# Altium PCB STM3205P_PCB.PcbDoc
Units mm, origin at the board's own origin, x right, y up, seen from the top; angles counter-clockwise.
Board outline 100 x 75.3 mm, 4 copper layers (Top Layer, Int1 (GND), Int2 (GND), Bottom Layer), stack 1.562 mm thick; 101 components, 84 nets, 329 pads, 73 vias.
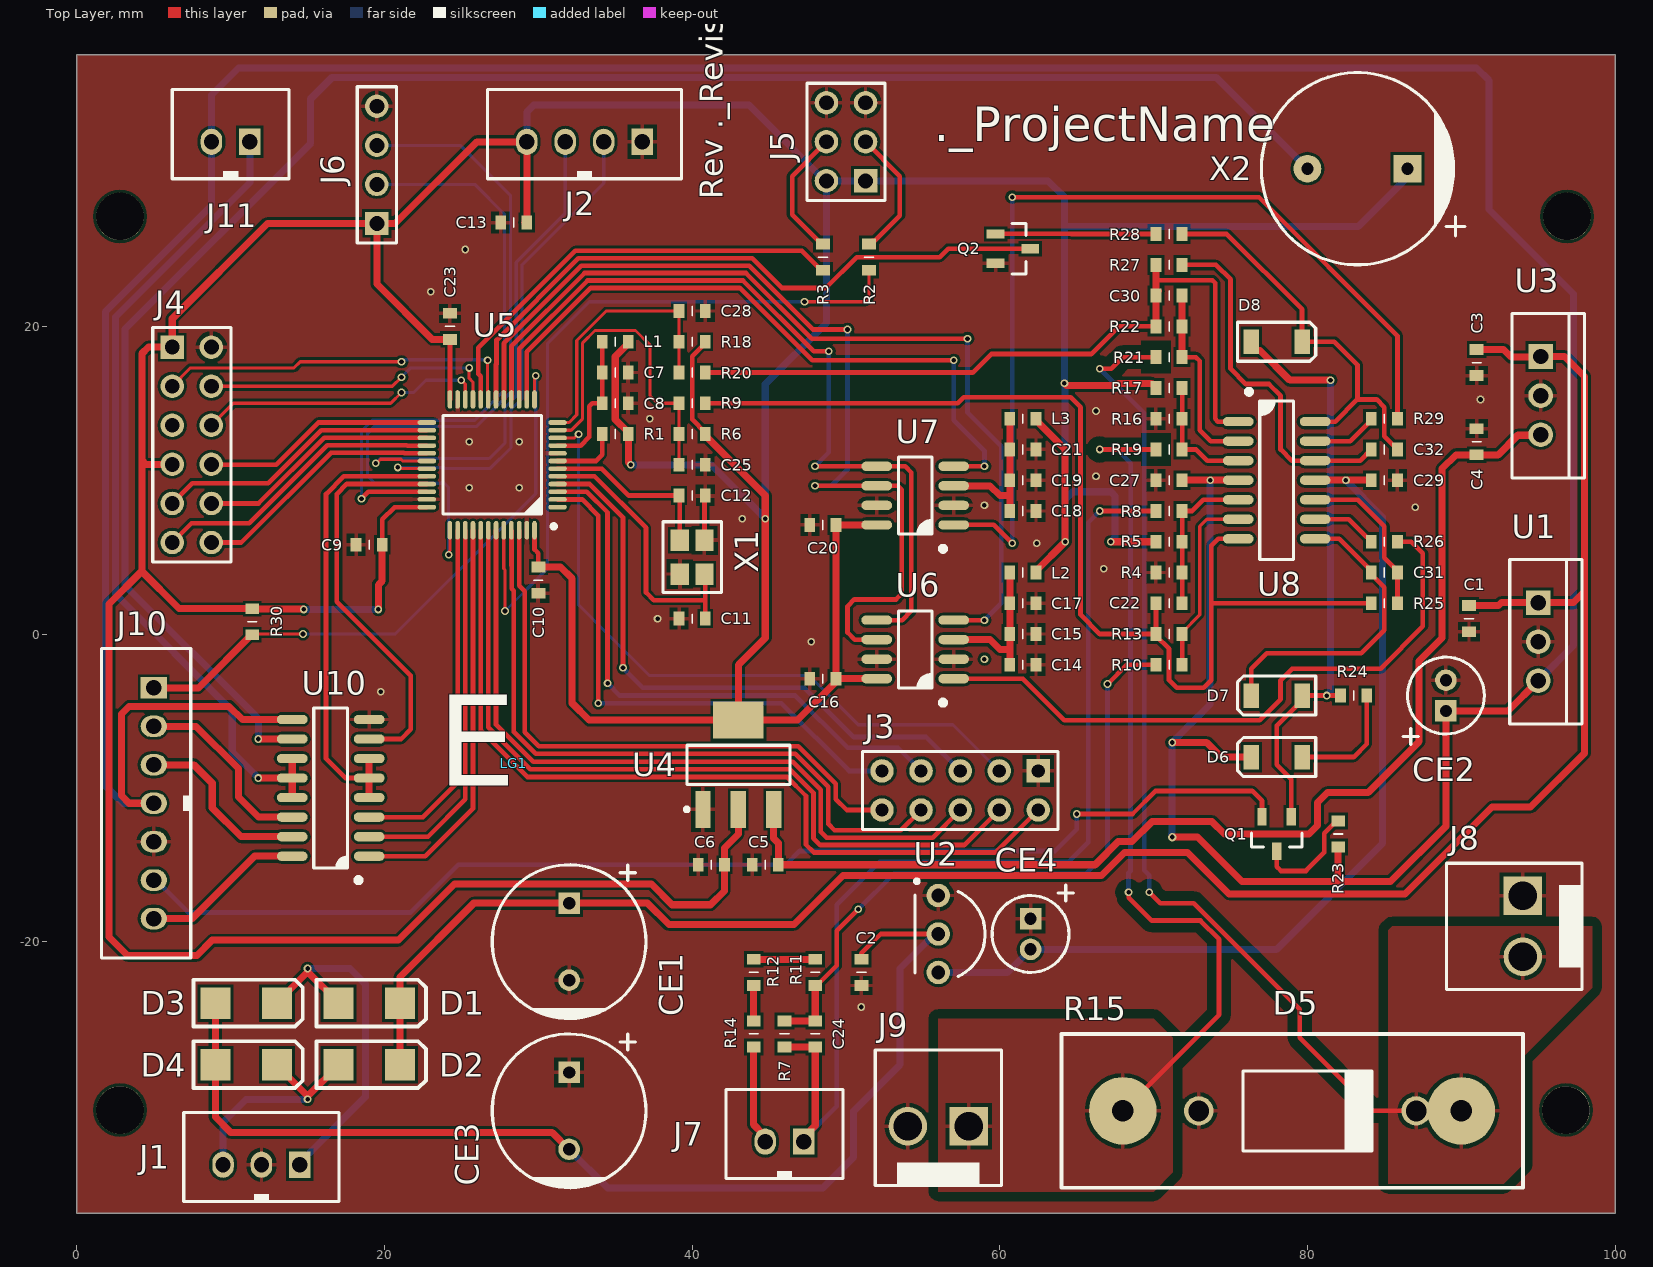
[diagram p0: Top Layer view]
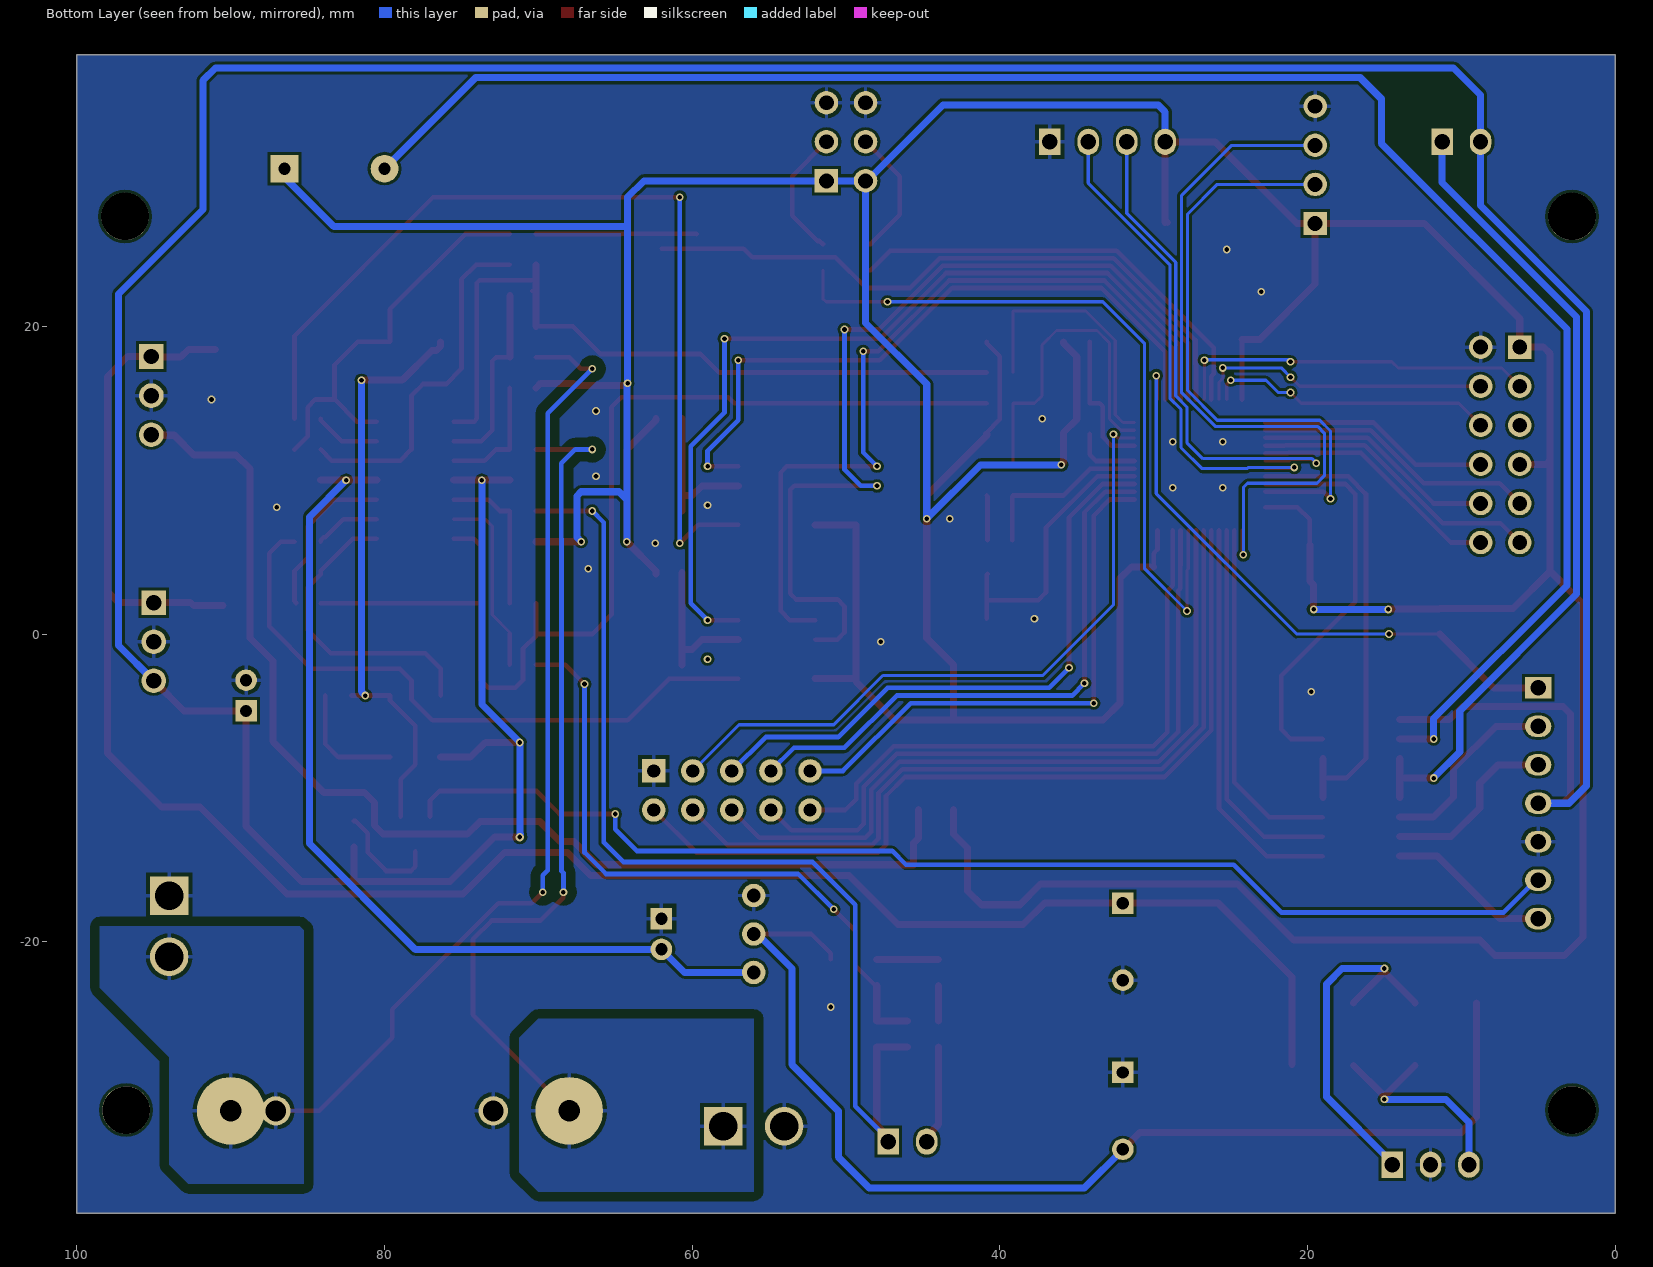
[diagram p1: Bottom Layer view, seen from below]
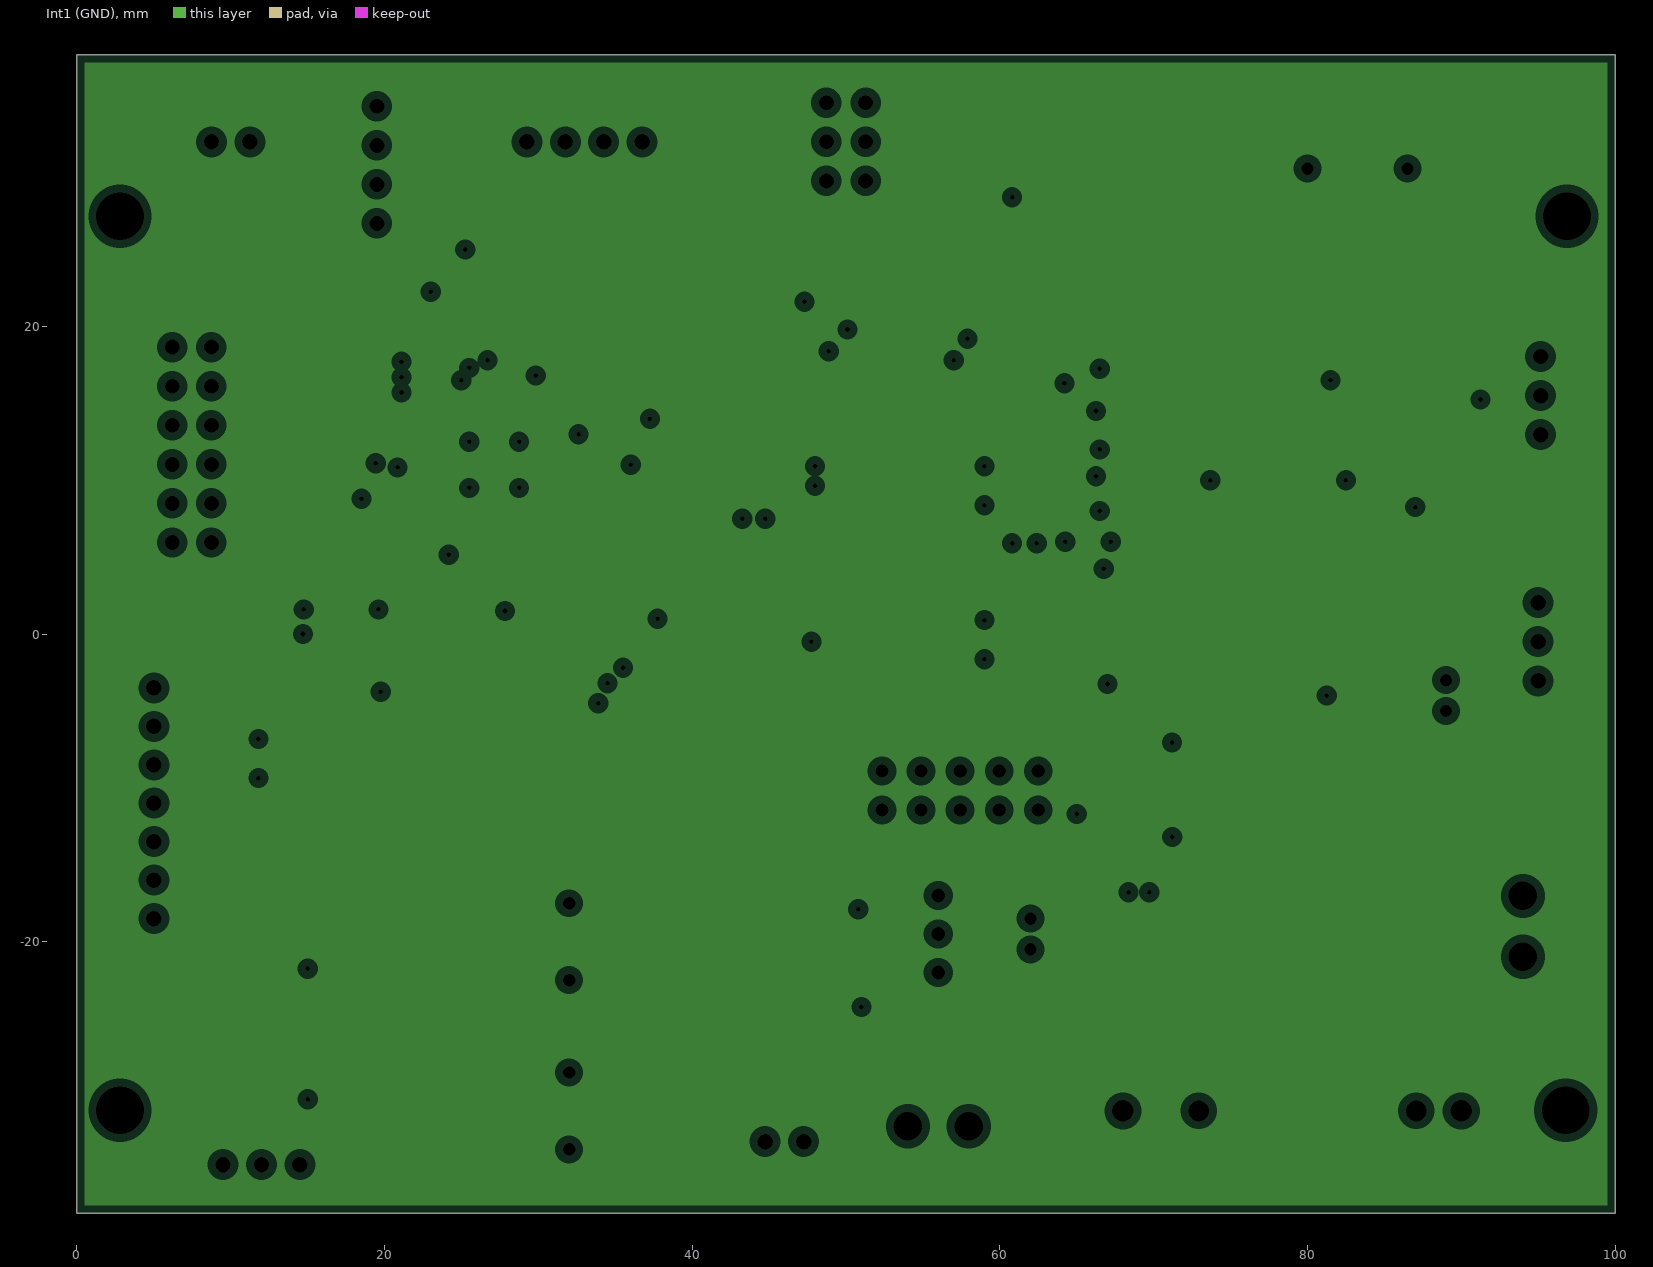
[diagram p2: Int1 (GND), clearances drawn from the general rule]
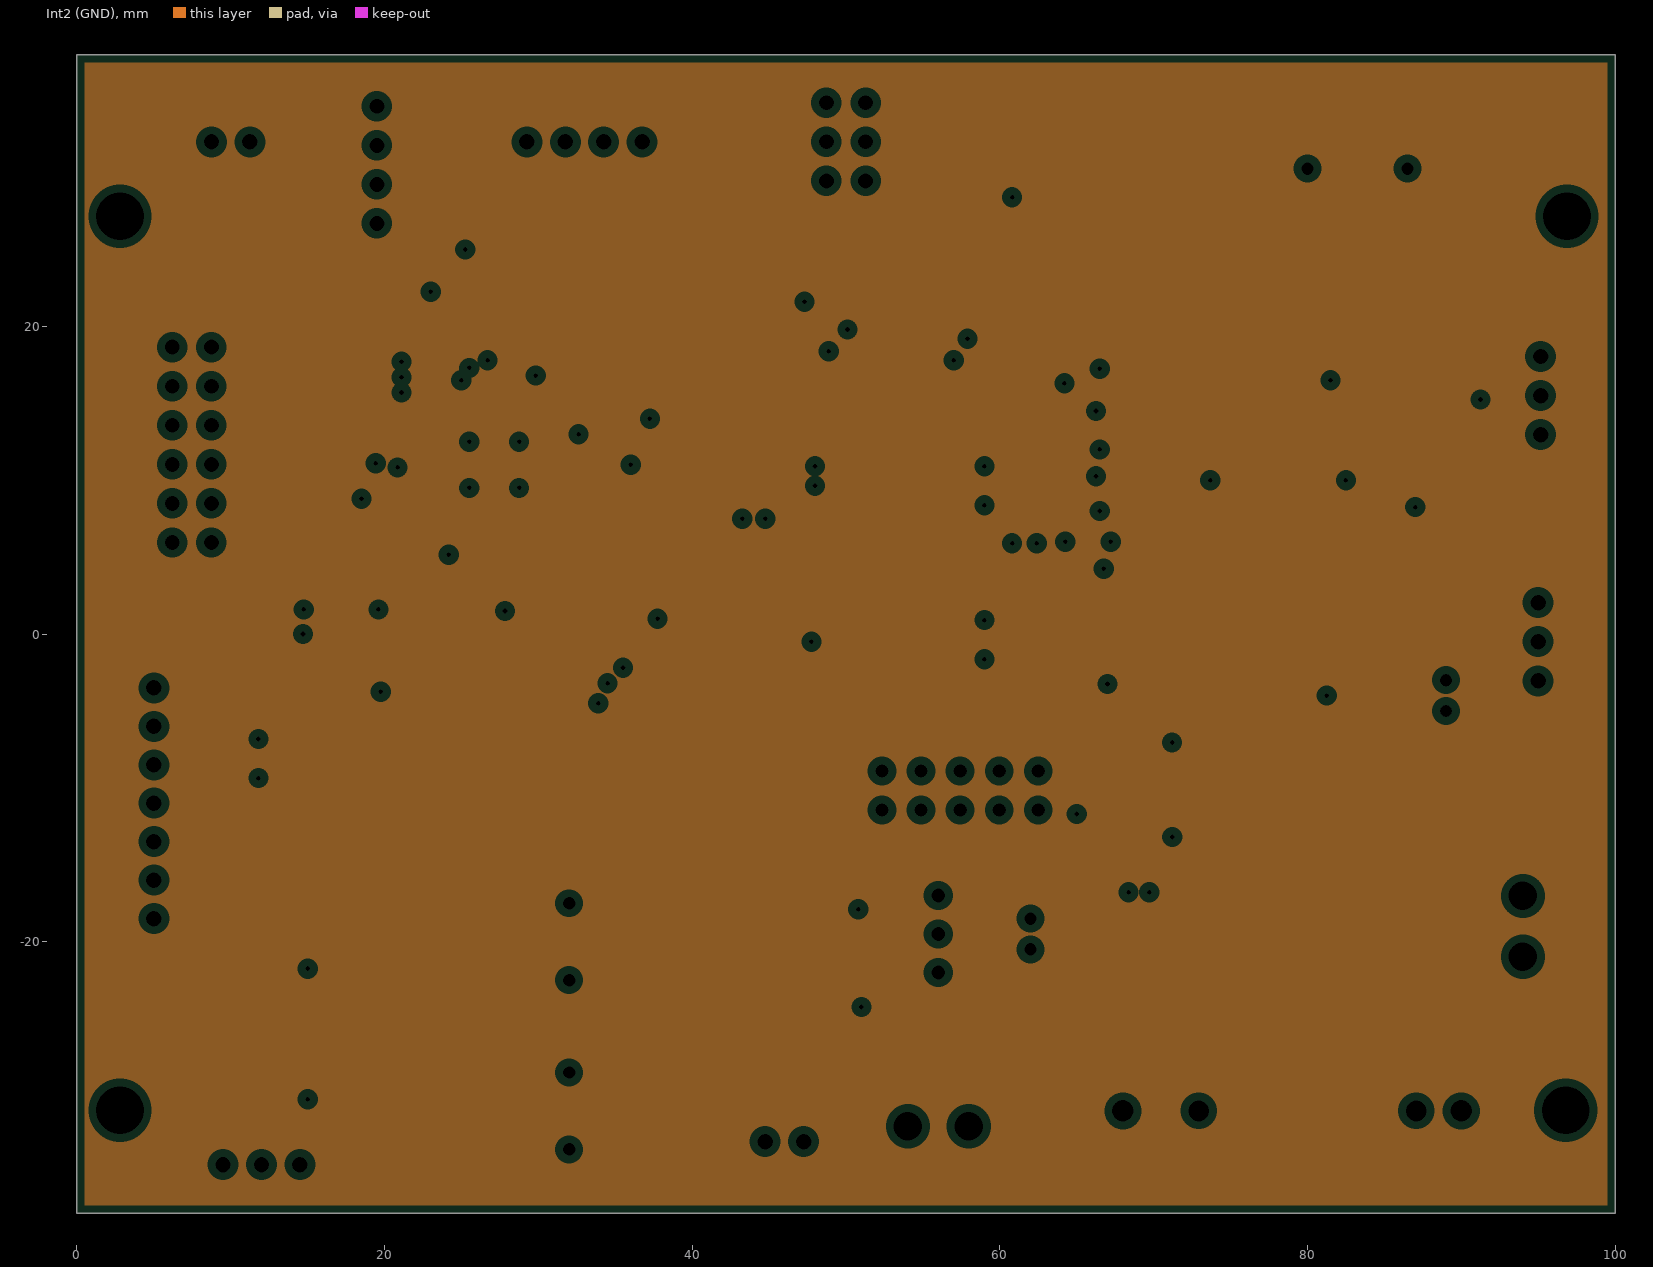
[diagram p3: Int2 (GND), clearances drawn from the general rule]
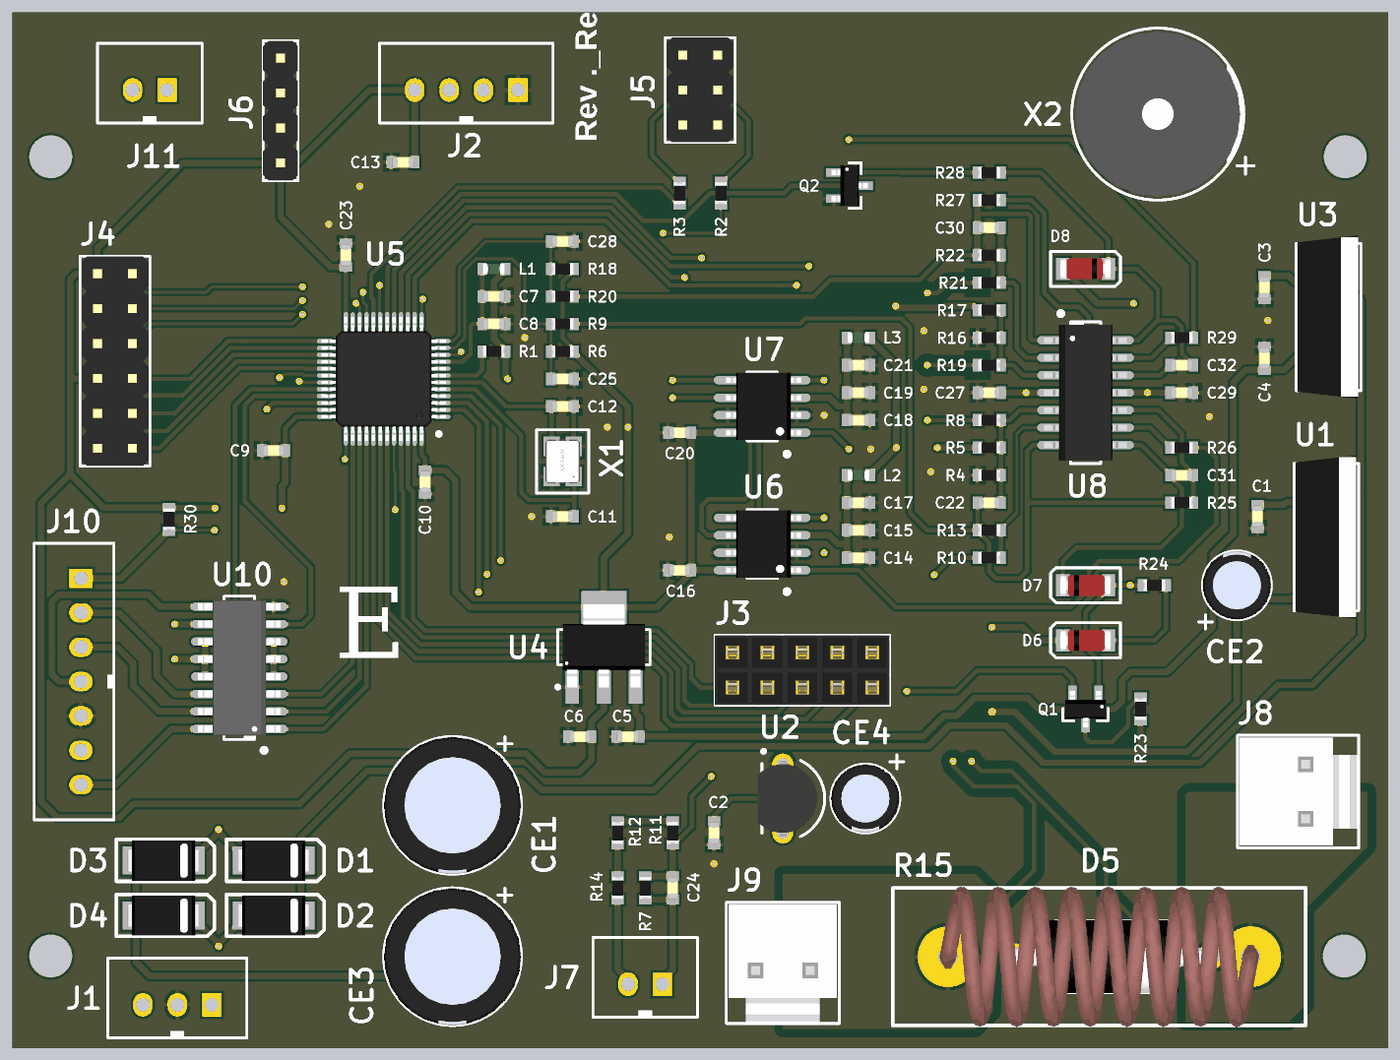
[diagram p4: 3D render of the assembled board from above, using the file's embedded part models]

## Layer stack, top to bottom
Top Solder: solder mask 0.0254, SM-001, Dk 4
Top Layer: signal copper 0.035
Dielectric 1: prepreg 0.196, PP-021, Dk 4.74
Int1 (GND): plane copper 0.035
Dielectric 3: core 1.03, Core-039, Dk 4.6
Int2 (GND): plane copper 0.035
Dielectric 5: prepreg 0.196, PP-021, Dk 4.74
Bottom Layer: signal copper 0.035
Bottom Solder: solder mask 0.0254, SM-001, Dk 4

## Board outline
0,-37.65 0,37.65 100,37.65 100,-37.65

## Design rules (kind name [scope] priority, off if disabled: settings)
Clearance Clearance_HV [InNetClass('HighVoltage') vs not InNetClass('HighVoltage')] p1: gap=0.61 ignorepadtopadclearanceinfootprint=FALSE
Clearance [All] p2: gap=0.178 ignorepadtopadclearanceinfootprint=FALSE
Height [All] p1: minheight=0 maxheight=100 prefheight=12.7
HoleSize [All] p1: absolutevalues=TRUE maxlimit=5 minlimit=0.025 maxpercent=80.000 minpercent=20.000
MinimumSolderMaskSliver [All] p1: minsoldermaskwidth=0.152
PlaneClearance [All] p1: clearance=0.508
PlaneConnect [All] p1: planeconnectstyle=Relief reliefexpansion=0.508 reliefentries=4 reliefconductorwidth=0.254 reliefairgap=0.254
PolygonConnect PolygonConnect_GND [InNet('GND') vs IsVia] p1: connectstyle=Direct reliefconductorwidth=0.254 reliefentries=4 polygonreliefangle="90 Angle" airgapwidth=0.254
PolygonConnect [All] p2: connectstyle=Relief reliefconductorwidth=0.254 reliefentries=4 polygonreliefangle="90 Angle" airgapwidth=0.254
RoomDefinition STM3205P_VoltageMeasure [InComponentClass('STM3205P_VoltageMeasure')] p1: confinementstyle=ConfineIn formatcopy=TRUE lockcomponents=FALSE outline -24,-76 313,-76 313,141 -24,141
RoomDefinition STM3205P_VoltageControl [InComponentClass('STM3205P_VoltageControl')] p2: confinementstyle=ConfineIn formatcopy=TRUE lockcomponents=FALSE outline -25,-75 314,-75 314,140 -25,140
RoomDefinition STM3205P_PowerSupply [InComponentClass('STM3205P_PowerSupply')] p3: confinementstyle=ConfineIn formatcopy=TRUE lockcomponents=FALSE outline -26,-74 315,-74 315,139 -26,139
RoomDefinition STM3205P_DigitalOutputs [InComponentClass('STM3205P_DigitalOutputs')] p4: confinementstyle=ConfineIn formatcopy=TRUE lockcomponents=FALSE outline -27,-73 316,-73 316,138 -27,138
RoomDefinition STM3205P_DACSPI [InComponentClass('STM3205P_DACSPI')] p5: confinementstyle=ConfineIn formatcopy=TRUE lockcomponents=FALSE outline -28,-72 317,-72 317,137 -28,137
RoomDefinition STM3205P_CurrentMeasure [InComponentClass('STM3205P_CurrentMeasure')] p6: confinementstyle=ConfineIn formatcopy=TRUE lockcomponents=FALSE outline -29,-71 318,-71 318,136 -29,136
RoomDefinition STM3205P_Controller [InComponentClass('STM3205P_Controller')] p7: confinementstyle=ConfineIn formatcopy=TRUE lockcomponents=FALSE outline -31,-69 320,-69 320,134 -31,134
RoomDefinition STM3205P_Connectors [InComponentClass('STM3205P_Connectors')] p8: confinementstyle=ConfineIn formatcopy=TRUE lockcomponents=FALSE outline -30,-70 319,-70 319,135 -30,135
RoutingVias [All] p1: holewidth=0.711 width=1.27 viastyle="Through Hole" minholewidth=0.711 minwidth=1.27 maxholewidth=0.711 maxwidth=1.27 useviatemplates=TRUE viatemplateguid#1={1249E212-4EAD-4EAC-ABEE-85B5BCC96FA9} viatemplateguid#2={913C4175-7CDF-410C-AC28-77CEBF39F82D} viatemplateguid#3={0D1975A4-CF16-4680-A64F-C83A10529796} viatemplateguid#4={D1504600-D0B6-4FC2-AC28-43F7F6CB2945} viatemplateguid#5={42F71831-EF3A-43EC-ACD2-E561B3B38A1A} viatemplateguid#6={46D3A4D5-F82F-4BC4-AE15-9083BA5A97E6} viatemplateguid#7={D8E3D815-1D68-4A32-87D0-9A78DFE6D1DE} viatemplatename#1=v50h30 viatemplatename#2=v51h30 viatemplatename#3=v56h30 viatemplatename#4=v61h41 viatemplatename#5=v66h41 viatemplatename#6=v71h51 viatemplatename#7=v76h51
SilkToSolderMaskClearance [IsPad] p1: minsilkscreentomaskgap=0.203 clearancetoexposedcopper=TRUE
SolderMaskExpansion [All] p1: expansion=0.01 istentingtop=FALSE
Width [All] p1: maxlimit=0.457 minlimit=0.203 preferedwidth=0.305
24 further rules are at their usual default settings.

## Classes and differential pairs
net class HighVoltage: MVCC NetJ9_1
component class STM3205P_VoltageMeasure: C22 C24 C25 J7 R4 R5 R6 R7 R8 R9 R10 R11 R12 R13 R14
component class STM3205P_VoltageControl: C31 C32 D6 D7 D8 Q1 Q2 R23 R24 R25 R26 R27 R28 R29
component class STM3205P_PowerSupply: C1 C2 C3 C4 C5 C6 CE1 CE2 CE3 CE4 D1 D2 D3 D4 U1 U2 U3 U4
component class STM3205P_DigitalOutputs: J10 J11 R30 U10 X2
component class STM3205P_DACSPI: C14 C15 C16 C17 C18 C19 C20 C21 L2 L3 U6 U7
component class STM3205P_CurrentMeasure: C27 C28 C29 C30 D5 J8 J9 R15 R16 R17 R18 R19 R20 R21 R22 U8
component class STM3205P_Controller: C7 C8 C9 C10 C11 C12 C13 C23 J5 J6 L1 R1 R2 R3 U5 X1
component class STM3205P_Connectors: J1 J2 J3 J4 LG1

## Components (designator, comment, footprint, x,y, rotation, side; value= is the part's Value field where it differs from the comment)
C1 "CC0603" CAP0603 90.5,1 r270 top value=100nF
C2 "CC0603" CAP0603 51,-22 r90 top value=100nF
C3 "CC0603" CAP0603 91,17.65 r270 top value=100nF
C4 "CC0603" CAP0603 91,12.5 r90 top value=100nF
C5 "CC0603" CAP0603 44.75,-15 r180 top value=100nF
C6 "CC0603" CAP0603 41.25,-15 r180 top value=100nF
C7 "CC0603" CAP0603 35,17 r0 top value=10nF
C8 "CC0603" CAP0603 35,15 r0 top value=100nF
C9 "CC0603" CAP0603 19,5.8 r180 top value=100nF
C10 "CC0603" CAP0603 30,3.5 r270 top value=100nF
C11 "CC0603" CAP0603 40,1 r180 top value=10nF
C12 "CC0603" CAP0603 40,9 r0 top value=10nF
C13 "CC0603" CAP0603 28.4,26.75 r180 top value=100nF
C14 "CC0603" CAP0603 61.5,-2 r0 top value=10uF
C15 "CC0603" CAP0603 61.5,0 r0 top value=100nF
C16 "CC0603" CAP0603 48.5,-2.905 r180 top value=100nF
C17 "CC0603" CAP0603 61.5,2 r0 top value=10nF
C18 "CC0603" CAP0603 61.5,8 r0 top value=10uF
C19 "CC0603" CAP0603 61.5,10 r0 top value=100nF
C20 "CC0603" CAP0603 48.5,7.095 r180 top value=100nF
C21 "CC0603" CAP0603 61.5,12 r0 top value=10nF
C22 "CC0603" CAP0603 71,2 r0 top value=10nF
C23 "CC0603" CAP0603 24.25,20 r90 top value=100nF
C24 "CC0603" CAP0603 48,-26 r270 top value=10nF
C25 "CC0603" CAP0603 40,11 r0 top value=10nF
C27 "CC0603" CAP0603 71,10 r0 top value=100nF
C28 "CC0603" CAP0603 40,21 r0 top value=10nF
C29 "CC0603" CAP0603 85,10 r180 top value=100nF
C30 "CC0603" CAP0603 71,22 r0 top value=10nF
C31 "CC0603" CAP0603 85,4 r0 top value=10nF
C32 "CC0603" CAP0603 85,12 r180 top value=10nF
CE1 "25V 470uF" 5.0-10.0-12.5 32,-20 r270 top value=470uF
CE2 "16V 100uF" 2.0-5.0-11.0 89,-4 r90 top value=100uF
CE3 "25V 470uF" 5.0-10.0-12.5 32,-31 r270 top value=470uF
CE4 "16V 100uF" 2.0-5.0-11.0 62,-19.5 r270 top value=100uF
D1 "FM4007" DO-214AC 19,-24 r180 top
D2 "FM4007" DO-214AC 19,-28 r180 top
D3 "FM4007" DO-214AC 11,-24 r180 top
D4 "FM4007" DO-214AC 11,-28 r180 top
D5 "1N5408" DO-201AD 80,-31 r0 top
D6 "BZV55-C5V1" SOD-80C 78,-8 r0 top value=5.1V
D7 "MM4148" SOD-80C 78,-4 r0 top
D8 "MM4148" SOD-80C 78,19 r180 top
J1 "B3B-XH-2" CONXH03STRMALE_2.5 12,-34.5 r0 top
J2 "B4B-XH-2" CONXH04STRMALE_2.5 33,32 r0 top
J3 "90151-2110" CONDIL10STRFEMALE_100_100 57.42,-10.17 r180 top locked
J4 "10-89-7121" CONDIL12STRMALE_100_100 7.47,12.3 r270 top locked
J5 "10-89-7062" CONDIL06STRMALE_100_100 50,32 r90 top
J6 "22-28-4043" CONSIL04STRMALE_100_100 19.5,30.5 r90 top
J7 "B2B-XH-2" CONXH02STRMALE_2.5 46,-33 r0 top
J8 "1-1123723-2" CONKK02STRMALE_156 94,-19 r270 top
J9 "1-1123723-2" CONKK02STRMALE_156 56,-32 r180 top
J10 "B7B-XH-2" CONXH07STRMALE_2.5 5,-11 r90 top
J11 "B2B-XH-2" CONXH02STRMALE_2.5 10,32 r0 top
L1 "BLM18" IND0603 35,19 r0 top value="220 Ohm"
L2 "BLM18" IND0603 61.5,4 r0 top value="220 Ohm"
L3 "BLM18" IND0603 61.5,14 r0 top value="220 Ohm"
LG1 "Canis-Tech Logo" "CT Logo 400th" 28.4,-8.4 r0 top
Q1 "BC846B" SOT-23 78,-13 r270 top
Q2 "BC846B" SOT-23 60.85,25.05 r0 top
R1 "Chip Resistor" RES0603 35,13 r180 top value=10k
R2 "Chip Resistor" RES0603 51.5,24.5 r90 top value=100k
R3 "Chip Resistor" RES0603 48.5,24.5 r270 top value=100k
R4 "Chip Resistor" RES0603 71,4 r180 top value=10k
R5 "Chip Resistor" RES0603 71,6 r180 top value=1M
R6 "Chip Resistor" RES0603 40,13 r0 top value=1M
R7 "Chip Resistor" RES0603 46,-26 r90 top value=4.3k
R8 "Chip Resistor" RES0603 71,8 r180 top value=10k
R9 "Chip Resistor" RES0603 40,15 r0 top value=10k
R10 "Chip Resistor" RES0603 71,-2 r180 top value=10k
R11 "Chip Resistor" RES0603 48,-22 r90 top value=10k
R12 "Chip Resistor" RES0603 44,-22 r270 top value=10k
R13 "Chip Resistor" RES0603 71,0 r0 top value=10k
R14 "Chip Resistor" RES0603 44,-26 r270 top value=10k
R15 "Chip Resistor" RESSHUNT 79,-31 r0 top value=0.1R
R16 "Chip Resistor" RES0603 71,14 r180 top value=10k
R17 "Chip Resistor" RES0603 71,16 r180 top value=1M
R18 "Chip Resistor" RES0603 40,19 r0 top value=1M
R19 "Chip Resistor" RES0603 71,12 r180 top value=2k
R20 "Chip Resistor" RES0603 40,17 r0 top value=10k
R21 "Chip Resistor" RES0603 71,18 r180 top value=2k
R22 "Chip Resistor" RES0603 71,20 r0 top value=10k
R23 "Chip Resistor" RES0603 82,-13 r270 top value=4.7k
R24 "Chip Resistor" RES0603 83,-4 r0 top value=4.7k
R25 "Chip Resistor" RES0603 85,2 r180 top value=100R
R26 "Chip Resistor" RES0603 85,6 r0 top value=100R
R27 "Chip Resistor" RES0603 71,24 r180 top value=100R
R28 "Chip Resistor" RES0603 71,26 r0 top value=100k
R29 "Chip Resistor" RES0603 85,14 r0 top value=100R
R30 "Chip Resistor" RES0603 11.4,0.8 r90 top value=20k
U1 "L7812CV" TO-220A 95,-0.5 r270 top
U2 "L79L12ACZ-TR" TO-92A_2.5 56,-19.5 r180 top
U3 "L7805CV" TO-220A 95.158,15.5 r270 top
U4 "LD1117S33TR" SOT-223 43,-8.5 r90 top
U5 "STM32F103C8T6" LQFP-48 27,11 r180 top
U6 "DAC8830ICD" SOIC-08-3.9mm 54.5,-1 r180 top
U7 "DAC8830ICD" SOIC-08-3.9mm 54.5,9 r180 top
U8 "TL084HIDR" SOIC-14-3.9mm 78,10 r0 top
U10 "ULN2003ADR" SOIC-16-3.9mm 16.5,-10 r180 top
X1 "FA-238A" CR3225 40,5 r90 top value="16 MHz"
X2 "CEM-1203(42)" CEM-1203 83.25,30.25 r180 top value=3.5V

## Footprints (in the part's own frame and the unit in brackets; to place one, negate y for a bottom-side part, rotate by r counter-clockwise, add the part's x,y. Pads: shape width x height; smd on the part's side, far side on the other; paste and mask are expansions set on the pad)
2.0-5.0-11.0 [mm] "Capacitor Eletrolytic (D=5,P=2)"
  rect 1.4x1.4 hole 0.8: 1(-1,0)
  round 1.4 hole 0.8: 2(1,0)
  silkscreen extent -3.17,-2.5 2.5,2.79, body extent -2.5,-2.5 2.5,2.5, height 11.05
5.0-10.0-12.5 [mm] "Capacitor Eletrolytic (D=10,P=5)"
  rect 1.4x1.4 hole 0.8: 1(-2.5,0)
  round 1.4 hole 0.8: 2(2.5,0)
  silkscreen extent -5,-5 5,5, body extent -5,-5 5,5, height 12.55
CAP0603 [mm] "Multilayer Ceramic Capacitors MLCC - SMD/SMT, Body 1.0x0.5mm"
  rect 0.7x0.9 smd mask+0.025: 1(-0.85,0) 2(0.85,0)
  silkscreen extent 0,-0.3 0,0.3, body extent -0.8,-0.4 0.8,0.4, height 6.5
CEM-1203 [mm] "Piezo Buzzers & Audio Indicators"
  rect 1.8x1.8 hole 0.8 mask+0.025: 1(-3.25,0)
  round 1.8 hole 0.8 mask+0.025: 2(3.25,0)
  silkscreen extent -7,-6.25 6.25,6.25, body extent -6,-6 6,6, height 8.5
CONDIL06STRMALE_100_100 [mil] "Headers & Wire Housings 6CKT"
  rect 60x60 hole 38: 1(-100,-50)
  round 60 hole 38: 2(-100,50) 3(0,-50) 4(0,50) 5(100,-50) 6(100,50)
  silkscreen extent -150,-100 150,100, body extent -150,-96 150,96, height 363
CONDIL10STRFEMALE_100_100 [mil] "CONN RCPT .100\" 810OS DL R/A GOLD/FEMALE"
  rect 60x60 hole 34: 1(-200,-50)
  round 60 hole 34: 2(-200,50) 3(-100,-50) 4(-100,50) 5(0,-50) 6(0,50) 7(100,-50) 8(100,50) 9(200,-50) 10(200,50)
  silkscreen extent -250,-100 250,100, body extent -250,-100 250,100, height 336
CONDIL12STRMALE_100_100 [mil] "Headers & Wire Housings 12CKT"
  rect 60x60 hole 38: 1(-250,-50)
  round 60 hole 38: 2(-250,50) 3(-150,-50) 4(-150,50) 5(-50,-50) 6(-50,50) 7(50,-50) 8(50,50) 9(150,-50) 10(150,50) 11(250,-50) 12(250,50)
  silkscreen extent -300,-100 300,100, body extent -300,-96 300,96, height 363
CONKK02STRMALE_156 [mm] "Headers & Wire Housings 2CKT"
  rect 2.5x2.5 hole 1.85: 1(-1.98,0)
  round 2.5 hole 1.85: 2(1.98,0)
  silkscreen extent -4.1,-4.95 4.1,3.85, body extent -3.93,-4.8 3.93,3.7, height 10.72
CONSIL04STRMALE_100_100 [mil] "Headers & Wire Housings 4CKT"
  rect 60x60 hole 38: 1(-150,0)
  round 60 hole 38: 2(-50,0) 3(50,0) 4(150,0)
  silkscreen extent -200,-50 200,50, body extent -200,-50 200,50, height 363
CONXH02STRMALE_2.5 [mm] "Connector XH 2CKT"
  rect 1.4x1.7 hole 1: 1(1.25,0)
  oval 1.4x1.7 hole 1: 2(-1.25,0)
  silkscreen extent -3.8,-2.4 3.8,3.4
CONXH03STRMALE_2.5 [mm] "Connector XH 3CKT"
  rect 1.4x1.7 hole 1: 1(2.5,0)
  oval 1.4x1.7 hole 1: 2(0,0) 3(-2.5,0)
  silkscreen extent -5.05,-2.4 5.05,3.4
CONXH04STRMALE_2.5 [mm] "Connector XH 4CKT"
  rect 1.4x1.7 hole 1: 1(3.75,0)
  oval 1.4x1.7 hole 1: 2(1.25,0) 3(-1.25,0) 4(-3.75,0)
  silkscreen extent -6.3,-2.4 6.3,3.4
CONXH07STRMALE_2.5 [mm] "Connector XH 7CKT"
  rect 1.4x1.7 hole 1: 1(7.5,0)
  oval 1.4x1.7 hole 1: 2(5,0) 3(2.5,0) 4(0,0) 5(-2.5,0) 6(-5,0) 7(-7.5,0)
  silkscreen extent -10.05,-2.4 10.05,3.4
CR3225 [mm] "QuartzCrystals SMD"
  rect 1.4x1.2 smd: 1(-1.1,-0.8) 2(1.1,-0.8) 3(1.1,0.8) 4(-1.1,0.8)
  silkscreen extent -2.3,-1.9 2.3,1.9, body extent -1.6,-1.25 1.6,1.25, height 1.2
"CT Logo 400th" [mm] "Canis-Tech Logo to print on PCB"
DO-201AD [mm] "HIGH EFFICIENCY FAST RECOVERY RECTIFIER DIODE"
  round 1.905 hole 1.35: A(-7.069,0) K(7.069,0)
  silkscreen extent -4.2,-2.6 4.2,2.6, body extent -7.73,-2.65 7.73,2.65, height 5.65
DO-214AC [mil] "Surface Mount General Rectifier"
  rect 77x80 smd: A(78.74,0) K(-78.74,0)
  silkscreen extent -145,-60 135,60, body extent -104,-57 104,58, height 95
IND0603 [mm] "Chip Inductor, Body 1.6x0.8mm, IPC Medium Density"
  rect 0.7x0.9 smd mask+0.025: 1(-0.85,0) 2(0.85,0)
  silkscreen extent 0,-0.3 0,0.3, body extent -0.8,-0.4 0.8,0.4, height 6.5
LQFP-48 [mm] "48-Pin Thin Plastic Quad Flat Pack 0.5 mm Pitch, 1.0/0.1 mm Lead Form, IPC Medium Density"
  oval 1.2x0.3 smd: 1(-4.25,2.75) 2(-4.25,2.25) 3(-4.25,1.75) 4(-4.25,1.25) 5(-4.25,0.75) 6(-4.25,0.25) 7(-4.25,-0.25) 8(-4.25,-0.75) 9(-4.25,-1.25) 10(-4.25,-1.75) 11(-4.25,-2.25) 12(-4.25,-2.75) 25(4.25,-2.75) 26(4.25,-2.25) 27(4.25,-1.75) 28(4.25,-1.25) 29(4.25,-0.75) 30(4.25,-0.25) 31(4.25,0.25) 32(4.25,0.75) 33(4.25,1.25) 34(4.25,1.75) 35(4.25,2.25) 36(4.25,2.75)
  oval 0.3x1.2 smd: 13(-2.75,-4.25) 14(-2.25,-4.25) 15(-1.75,-4.25) 16(-1.25,-4.25) 17(-0.75,-4.25) 18(-0.25,-4.25) 19(0.25,-4.25) 20(0.75,-4.25) 21(1.25,-4.25) 22(1.75,-4.25) 23(2.25,-4.25) 24(2.75,-4.25) 37(2.75,4.25) 38(2.25,4.25) 39(1.75,4.25) 40(1.25,4.25) 41(0.75,4.25) 42(0.25,4.25) 43(-0.25,4.25) 44(-0.75,4.25) 45(-1.25,4.25) 46(-1.75,4.25) 47(-2.25,4.25) 48(-2.75,4.25)
  Top Layer region: -2.225,3.175
  silkscreen extent -4.13,-3.2 3.2,4.12, body extent -4.51,-4.51 4.51,4.51, height 1.5
RES0603 [mm] "Chip Resistor, Body 1.6x0.8mm"
  rect 0.7x0.9 smd mask+0.025: 1(-0.85,0) 2(0.85,0)
  silkscreen extent 0,-0.3 0,0.3, body extent -0.8,-0.4 0.8,0.4, height 6.5
RESSHUNT [mm]
  round 4.4 hole 1.4: 1(-11,0) 2(11,0)
  silkscreen extent -15,-5 15,5, body extent -11.6,-5.1 11.6,5.1, height 29.35
SOD-80C [mm] "Surface Mount General Rectifier"
  rect 1x1.6 smd mask+0.05: A(1.65,0) K(-1.65,0)
  silkscreen extent -2.54,-1.27 2.54,1.27, body extent -1.85,-0.8 1.85,0.79, height 1.6
SOIC-08-3.9mm [mm] "SOIC, 8-Leads, Body 4.9x3.9mm, Pitch 1.27mm, IPC Medium Density"
  oval 2x0.6 smd: 1(-2.5,1.905) 2(-2.5,0.635) 3(-2.5,-0.635) 4(-2.5,-1.905) 5(2.5,-1.905) 6(2.5,-0.635) 7(2.5,0.635) 8(2.5,1.905)
  silkscreen extent -1.95,-2.5 1.1,3.61, body extent -2.83,-2.45 2.63,2.45, height 1.73
SOIC-14-3.9mm [mm] "SOIC, 14-Leads, Body 3.9mm, Pitch 1.27mm"
  oval 2x0.6 smd: 1(-2.5,3.81) 2(-2.5,2.54) 3(-2.5,1.27) 4(-2.5,0) 5(-2.5,-1.27) 6(-2.5,-2.54) 7(-2.5,-3.81) 8(2.5,-3.81) 9(2.5,-2.54) 10(2.5,-1.27) 11(2.5,0) 12(2.5,1.27) 13(2.5,2.54) 14(2.5,3.81)
  silkscreen extent -1.95,-5.15 1.1,5.9, body extent -3.01,-4.95 3.01,4.95, height 1.65
SOIC-16-3.9mm [mm] "SOIC, 16-Leads, Body 4.9x3.9mm, Pitch 1.27mm, IPC Medium Density"
  oval 2x0.6 smd mask+0.05: 1(-2.5,4.445) 2(-2.5,3.175) 3(-2.5,1.905) 4(-2.5,0.635) 5(-2.5,-0.635) 6(-2.5,-1.905) 7(-2.5,-3.175) 8(-2.5,-4.445) 9(2.5,-4.445) 10(2.5,-3.175) 11(2.5,-1.905) 12(2.5,-0.635) 13(2.5,0.635) 14(2.5,1.905) 15(2.5,3.175) 16(2.5,4.445)
  silkscreen extent -1.95,-5.2 1.1,6.15, body extent -2.99,-4.95 2.99,4.95, height 1.35
SOT-23 [mm] "SOT23, 3-Leads, Body 2.9x1.3mm, Pitch 0.95mm, Lead Span 2.5mm, IPC Medium Density"
  rect 1.15x0.6 smd: 1(-1.125,0.95) 2(-1.125,-0.95) 3(1.125,0)
  silkscreen extent -0.05,-1.65 0.85,1.65, body extent -1.31,-1.49 1.31,1.49, height 1.12
SOT-223 [mm] "SOT223, 4-Leads, Body 6.5x3.5mm, Pitch 2.3mm, Lead Span 7mm, IPC Medium Density"
  rect 2.4x1 smd: 1(-2.9,2.3) 2(-2.9,0) 3(-2.9,-2.3)
  rect 2.4x3.3 smd: 4(2.9,0)
  silkscreen extent -3.02,-3.35 1.27,3.47, body extent -2.91,-3.01 3.12,3.01, height 1.38
TO-92A_2.5 [mil] "TO, Flat Index; 3 In-Line, Axial Leads; Body Dia. 4.8mm; Leads 0.55 x 0.51 mm (max)"
  round 60 hole 35: 1(0,-98.43) 2(0,0) 3(0,98.43)
  silkscreen extent -120,-140 60,109, body extent -99,-108 73,108, height 323
TO-220A [mm] "TO, Thru-Hole, Vertical, Heatsink Mounted; 3 In-Line Leads; Pitch 2.54 mm"
  rect 1.6x1.6 hole 1: 1(-2.54,0)
  round 1.6 hole 1: 2(0,0) 3(2.54,0)
  silkscreen extent -5.35,-1.85 5.35,2.85, body extent -5.94,-1.75 5.94,2.65, height 20.11

## Part data
C1 C2 C3 C4 C5 C6 C7 C8 C9 C10 C13 C14 C15 C16 C17 C18 C19 C20 C21 C22 C23 C25 C27 C28 C29 C30 C31 C32: "Surface Mount Multilayer Ceramic Chip Capacitors  for Commercial Applications", Manufacturer1=Yageo, PartNumber1=EMPTY, Tolerance=20%, Voltage=50V, LatestRevisionDate=19-Jun-2016, PackageDescription="CAP0603;2 Leads", PackageReference=CAP0603, Published=19-Jun-2016, Publisher="Lucas Moraes"
C11 C12 C24: "Surface Mount Multilayer Ceramic Chip Capacitors  for Commercial Applications", Manufacturer1=Yageo, PartNumber1=EMPTY, Tolerance=20%, Voltage=100V, LatestRevisionDate=19-Jun-2016, PackageDescription="CAP0603;2 Leads", PackageReference=CAP0603, Published=19-Jun-2016, Publisher="Lucas Moraes"
CE1 CE3: "Electrolytic Capacitor PTH", Manufacturer1=Nichicon, PartNumber1=UVK1E471MPD, Tolerance=20%, Voltage=25V, Code=471, LatestRevisionDate=24-Aug-2025, LatestRevisionNote=Created, PackageDescription="5.0-10.0-12.5;2 Leads", PackageReference=5.0-10.0-12.5, Published=24-Aug-2025, Publisher="Lucas Moraes"
CE2 CE4: "Electrolytic Capacitor PTH", Manufacturer1=Nichicon, PartNumber1=UVZ1C101MDD, Tolerance=20%, Voltage=16V, Code=101, LatestRevisionDate=26-Dec-2016, LatestRevisionNote=Created, PackageDescription="2-5;2 leads", PackageReference=2-5, Published=26-Dec-2016, Publisher="Lucas Moraes"
D1 D2 D3 D4: "General Purpose Plastic Rectifier", Manufacturer1=Rectron, If=1A, LatestRevisionDate=25-Feb-2019, PackageDescription="DO-214AC; 2 Leads", PackageReference=DO-214AC, PartNumber1=FM4007, Published=25-Feb-2019, Publisher="Lucas Moraes", Vf=1.1V, Vrrm=1000V
D5: "Rectifiers Diode, 1000V, 3A", Manufacturer1="Diotec Semiconductor", If=3A, LatestRevisionDate=26-Nov-2022, PackageDescription="DO-201; 2 Leads", PackageReference=DO-201, PartNumber1=1N5408, Published=26-Nov-2022, Publisher="Lucas Moraes", Vf=1.2V, Vrrm=1000V
D6: "Zener Diodes 5.1V 0.5W", Manufacturer1=Nexperia, Power=0.5W, LatestRevisionDate=02-May-2024, PackageDescription="SOD-80C; 2 Leads", PackageReference=SOD-80C, PartNumber1=BZV55-C5V1, Published=02-May-2024, Publisher="Lucas Moraes"
D7 D8: "General Purpose Plastic Rectifier", If=300mA, LatestRevisionDate=11-May-2016, PackageDescription="SOD-80C; 2 Leads", PackageReference=SOD-80C, PartNumber1=MM4148, Published=11-May-2016, Publisher="Lucas Moraes", Vf=1.0V, Vrrm=100V
J1: "XH Connector 3 POS HDR VERT 2.5mm", Manufacturer1=JST, Gender=Male, LastRevisionNote=Created, LatestRevisionDate=04-Oct-2025, PackageDescription="CONXH03STRMALE_2.5; 3 Leads", PackageReference=CONXH03STRMALE_2.5, PartNumber1=B3B-XH-2, Pins="2 pins", Pitch=2.5mm, Published=04-Oct-2025, Publisher="Lucas Moraes", Type=Pin
J2: "XH Connector 4 POS HDR VERT 2.5mm", Manufacturer1=JST, Gender=Male, LastRevisionNote=Created, LatestRevisionDate=04-Oct-2025, PackageDescription="CONXH04STRMALE_2.5; 4 Leads", PackageReference=CONXH04STRMALE_2.5, PartNumber1=B4B-XH-2, Pins="4 pins", Pitch=2.5mm, Published=04-Oct-2025, Publisher="Lucas Moraes", Type=Pin
J3: "Headers & Wire Housings C-Grid PCB Conn Dual Row Vertical 10Ckt", Manufacturer1=Molex, Direction=90, Gender=Female, LastRevisionNote=Created, LatestRevisionDate=03-Jan-2025, PackageDescription="CONDIL10STRFEMALE_100_100; 10 Leads", PackageReference=CONDIL10STRFEMALE_100_100, PartNumber1=90151-2110, Pins="10 pins", Pitch=2.54mm, Published=03-Jan-2025, Publisher="Lucas Moraes", Type=Socket
J4: "Headers & Wire Housings C-Grid PCB Conn SR V onn SR Vt Tn-A 12Ckt", Manufacturer1=Molex, Direction=180, Gender=Male, LastRevisionNote=Created, LatestRevisionDate=15-Sep-2017, PackageDescription="CONDIL12; 12 Leads", PackageReference=CONDIL12, PartNumber1=10-89-7121, Pins="12 pins", Pitch=2.54mm, Published=15-Sep-2017, Publisher="Lucas Moraes", Type=Pin
J5: "Headers & Wire Housings C-Grid PCB Conn SR V onn SR Vt Tn-A 8Ckt", Manufacturer1=Molex, Direction=180, Gender=Male, LastRevisionNote=Created, LatestRevisionDate=12-Sep-2017, PackageDescription="CONDIL6; 6 Leads", PackageReference=CONDIL6, PartNumber1=10-89-7062, Pins="6 pins", Pitch=2.54mm, Published=12-Sep-2017, Publisher="Lucas Moraes", Type=Pin
J6: "Headers & Wire Housings 04 MODII HDR SRST B/A .100CL", Manufacturer1=Molex, Gender=Male, LastRevisionNote=Created, LatestRevisionDate=27-Mar-2023, PackageDescription="CONSIL04STRMALE_100_100; 4 Leads", PackageReference=CONSIL04STRMALE_100_100, PartNumber1=22-28-4043, Pins="4 pins", Pitch=2.54mm, Published=27-Mar-2023, Publisher="Lucas Moraes", Type=Pin
J7 J11: "XH Connector 2 POS HDR VERT 2.5mm", Manufacturer1=JST, Gender=Male, LastRevisionNote=Created, LatestRevisionDate=04-Oct-2025, PackageDescription="CONXH02STRMALE_2.5; 2 Leads", PackageReference=CONXH02STRMALE_2.5, PartNumber1=B2B-XH-2, Pins="2 pins", Pitch=2.5mm, Published=04-Oct-2025, Publisher="Lucas Moraes", Type=Pin
J8 J9: "Header Vert 3.96mm 2Pos", Manufacturer1="TE Connectivity", Gender=Male, LastRevisionNote=Created, LatestRevisionDate=16-Aug-2025, PackageDescription="CONKK02STRMALE_156; 2 Leads", PackageReference=CONKK02STRMALE_156, PartNumber1=1-1123723-2, Pins=2, Pitch=3.96mm, Published=16-Aug-2025, Publisher="Lucas Moraes", Type=Pin
J10: "XH Connector 7 POS HDR VERT 2.5mm", Manufacturer1=JST, Gender=Male, LastRevisionNote=Created, LatestRevisionDate=04-Oct-2025, PackageDescription="CONXH07STRMALE_2.5; 7 Leads", PackageReference=CONXH07STRMALE_2.5, PartNumber1=B7B-XH-2, Pins="7 pins", Pitch=2.5mm, Published=04-Oct-2025, Publisher="Lucas Moraes", Type=Pin
L1 L2 L3: "Ferrite Beads 0603", Current=1.4A, Manufacturer1="Murata Electronics", PartNumber1=BLM18PG(VVV)SN1D, Tolerance=25%, Code=221, LatestRevisionDate=22-Dec-2016, PackageDescription="IND0603; 2 Leads", PackageReference=IND0603, Published=22-Dec-2016, Publisher="Lucas Moraes"
LG1: "Canis-Tech LOGO", LatestRevisionDate=14-Jul-2023, PackageDescription="SEW Logo 100th; No Leads", PackageReference="SEW Logo 100th", Published=14-Jul-2023, Publisher="Lucas Moraes"
Q1 Q2: "Transistor BJT NPN 65V 0.1A 150mW", Manufacturer1=onsemi, PartNumber1=BC846BLT3G, Power=150mW, hFe=300, Ic=100mA, LatestRevisionDate=20-Sep-2018, LatestRevisionNote=Created, PackageDescription="SOT23; 3Leads", PackageReference=SOT23, Published=20-Sep-2018, Publisher="Lucas Moraes", Vce=65V
R1 R2 R3 R4 R5 R6 R7 R8 R9 R10 R11 R12 R13 R14 R16 R17 R18 R19 R20 R21 R22 R23 R24 R25 R26 R27 R28 R29 R30: library part CRCW0603, "Thick Film Chip Resistors with CECC Approval,  available with Established Reliability", Manufacturer1=Vishay, PartNumber1=CRCW0603(RRRR)(T)(C)(PP)(SS), Power=0.1W, Tolerance=5%, LatestRevisionDate=06-May-2016, PackageDescription="SMD 0603; 2 Leads", PackageReference=0603, Published=06-May-2016, Publisher="Lucas Moraes"
R15: library part RESSHUNT, "Thick Film Chip Resistors with CECC Approval,  available with Established Reliability", Power=5W, Tolerance=5%, LatestRevisionDate=18-Agu-2025, PackageDescription="RESSHUNT; 2 Leads", PackageReference=RESSHUNT, Published=18-Agu-2025, Publisher="Lucas Moraes"
U1: "Positive voltage regulator ICs", Current=1.5A, Manufacturer1=STMicroelectronics, Voltage=12V, LatestRevisionDate=25-Jun-2023, LatestRevisionNote=Created, PackageDescription="TO220A;3 Leads", PackageReference=TO220A, PartNumber1=L7812CV, Published=29-May-2016, Publisher="Lucas Moraes"
U2: "Negative voltage regulator ICs", Current=0.1A, Manufacturer1=STMicroelectronics, Voltage=-12V, LatestRevisionDate=17-Aug-2025, LatestRevisionNote=Created, PackageDescription="TO-92;3 Leads", PackageReference=TO-92, PartNumber1=L79L12ACZ-TR, Published=17-Aug-2025, Publisher="Lucas Moraes"
U3: "Positive voltage regulator ICs", Current=1.5A, Manufacturer1=STMicroelectronics, Voltage=5V, LatestRevisionDate=25-Jun-2023, LatestRevisionNote=Created, PackageDescription="TO220A;3 Leads", PackageReference=TO220A, PartNumber1=L7805CV, Published=29-May-2016, Publisher="Lucas Moraes"
U4: "Positive voltage regulator ICs", Current=0.8A, Manufacturer1=STMicroelectronics, Voltage=3.3V, LatestRevisionDate=20-Sep-2019, LatestRevisionNote=Created, PackageDescription="SOT-223;3 Leads", PackageReference=SOT-223, PartNumber1=LD1117S33TR, Published=20-Sep-2019, Publisher="Lucas Moraes"
U5: "32-bit Microcontrollers - ARM Cortex-M0+ 32kB Flash, 6kB RAM", Manufacturer1=STMicroelectronics, LatestRevisionDate=01-May-2024, LatestRevisionNote=Created, PackageDescription="LQFP-48; 48 leads", PackageReference=LQFP-48, PartNumber1=STM32F103C8T6, Published=01-May-2024, Publisher="Lucas Moraes"
U6 U7: "DAC Lo-Pwr R-To-R Output 16-Bit Serial Input", Manufacturer1="Texas Instruments", PartNumber1=DAC8830IBD, Datasheet=https://www.ti.com/lit/ds/symlink/dac8830.pdf, LatestRevisionDate=02-Apr-2025, LatestRevisionNote=Created, PackageDescription="SOIC-08-3.9mm; 8 Leads", PackageReference=SOIC-08-3.9mm, Published=02-Apr-2025, Publisher="Lucas Moraes"
U8: "Quad Operational Amplifiers RRIO", Manufacturer1="Texas Instruments", Datasheet=https://www.ti.com/lit/ds/symlink/tl084.pdf, LatestRevisionDate=27-Aug-2025, LatestRevisionNote=Created, PackageDescription="SOIC14; 14 Leads", PackageReference=SOIC14, PartNumber1=TL084HIDR, Published=27-Aug-2025, Publisher="Lucas Moraes"
U10: "Darlington Transistors Arrays NPN 7-Ch", Manufacturer1="Texas Instruments", LatestRevisionDate=15-Oct-2023, LatestRevisionNote=Created, PackageDescription="SOIC-16-3.9mm; 16 Leads", PackageReference=SOIC-16-3.9mm, PartNumber1=ULN2003ADR, Published=15-Oct-2023, Publisher="Lucas Moraes"
X1: "Crystals FA-238A XTAL MHZ -40 125C 7.0PF 250TR", Manufacturer1="Epson Timing", Tolerance="20 ppm", Datasheet=https://br.mouser.com/datasheet/2/137/FA_238A_en-1649567.pdf, LatestRevisionDate=03-Dec-2021, PackageDescription="FA-238A;2 Leads", PackageReference=FA-238A, PartNumber1=FA-238A, Published=03-Dec-2021, Publisher="Lucas Moraes"
X2: "12 mm, 3.5 Vo-p, 95 dB, Through Hole, Magnetic Audio Transducer Buzzer", Manufacturer1="Same Sky", Datasheet=https://www.mouser.com/datasheet/3/6118/1/cem-1203-42-.pdf, LatestRevisionDate=05-Oct-2025, PackageDescription="CEM-1203;2 Leads", PackageReference=CEM-1203, PartNumber1=CEM-1203(42), Published=05-Oct-2025, Publisher="Lucas Moraes"

## Free pads (board coordinates)
  round 3.1 hole 3.1: MH1(96.875,27.15) MH2(96.8,-30.95) MH3(2.8,-30.95) MH4(2.8,27.15)

## Via types
v1: diameter 0.5, hole 0.3, Top Layer to Bottom Layer, 70 vias
v2: diameter 0.508, hole 0.305, Top Layer to Bottom Layer, 2 vias
v3: diameter 0.559, hole 0.305, Top Layer to Bottom Layer, 1 vias

## Nets (pads, with @x,y where several pads share a name; then routed paths per layer and width w, separated by ;. In a path a pad name is that pad's centre, name@x,y a point inside that pad or via, vN(x,y) a via of type N, cw(c..) or ccw(c..) an arc to the next point about the centre after c; other vN are vias at no path point)
+15VAC: D1.A D3.K J1.1 | length 23.8
  Top Layer w0.457: D3.K 13,-23.962 14.99,-21.972 14.99,-21.76 v2(15,-21.75) 15.01,-21.76 15.01,-21.972 17,-23.962 D1.A
  Bottom Layer w0.457: J1.1 14.5,-34.35 18.75,-30.1 18.75,-22.75 17.75,-21.75 v2(15,-21.75)
+VDCIN: C1.1 C3.1 CE1.1 D1.K D2.K U1.1 U3.1 | length 132.2
  Top Layer w0.457: D2.K D1.K 21,-22.298 25.798,-17.5 CE1.1 37.102,-17.5 38.487,-18.885 46.615,-18.885 49.8,-15.7 66.602,-15.7 68.102,-14.2 72.2,-14.2 74.9,-16.9 86.35,-16.9 92,-11.25 94.5,-11.25 98,-7.75 98,2.75 ; C1.1 92.419,1.85 92.609,2.04 U1.1 97.29,2.04 98,2.75 ; C3.1 92.75,18.5 93.25,18 95.118,18 U3.1 96.71,18.04 98,16.75 98,2.75
-15VAC: D2.A D4.K J1.3 | length 14.5
  Top Layer w0.457: D4.K@13,-28.038 v2@14.99,-30.028 ; v2@15.01,-30.028 D2.A@17,-28.038
  Bottom Layer w0.457: J1.3 9.5,-31.75 11,-30.25 v2(15,-30.25)
-VDCIN: C2.2 CE3.2 D3.A D4.A U2.2 | length 74.5
  Top Layer w0.305: C2.2 51,-20.75 52.25,-19.5 U2.2
  Top Layer w0.457: D3.A D4.A 9,-31.4 10,-32.4 30.9,-32.4 CE3.2
  Bottom Layer w0.457: CE3.2 34.5,-36 48.5,-36 50.5,-34 50.5,-31 53.5,-28 53.5,-21.75 55.75,-19.5 U2.2
AD1: C22.1 R9.2 R13.1 R25.2 U8.7 | length 73.4
  Top Layer w0.305: R9.2 57.25,15 57.65,15.4 64.6,15.4 65.25,14.75 65.25,1.25 66.5,0 R13.1 ; C22.1 R13.1 ; U8.7 74.19,6.19 73.75,5.75 73.75,2 ; R25.2 73.75,2 ; R13.1 70.15,-0.1 71,-0.95 71,-3 71.5,-3.5 73.25,-3.5 73.75,-3 73.75,2
AD1F: C25.1 R6.1 R9.1 U5.11 | length 21.4
  Top Layer w0.203: U5.11 32.131,13.25 32.881,14 32.881,18.926 33.684,19.729 36.316,19.729 37.25,18.795 37.25,15.5 37.75,15 R9.1 R6.1 C25.1
AD2: C30.1 R20.2 R22.1 R27.2 U8.1 | length 49.2
  Top Layer w0.305: R20.2 58.25,17 59.45,18.2 65.95,18.2 67.75,20 R22.1 ; C30.1@70.15,22.1 70.348,22.298 C30.1@70.384,22.298 ; 70.15,23.05 70.2,23 73.821,23 74,22.821 74,13.989 74.179,13.81 U8.1
  Top Layer w0.457: R22.1 C30.1 70.15,22.1 70.15,22.298 70.15,23.05 R27.2
AD2F: C28.1 R18.1 R20.1 U5.12 | length 17.7
  Top Layer w0.203: U5.12 32,13.75 32.5,14.25 32.5,19.084 34.416,21 C28.1 R18.1 R20.1
BkeyLeft: J3.9 U5.2 | length 35.5
  Top Layer w0.305: U5.2 32.85,8.75 33.9,7.7 v1(33.9,-4.5)
  Bottom Layer w0.305: v1(33.9,-4.5) 45.8,-4.5 50.2,-8.9 J3.9
BkeyRight: J3.10 U5.46 | length 39.2
  Top Layer w0.305: U5.46 28.75,3.15 29.125,2.775 29.125,-6.395 30.03,-7.3 46.9,-7.3 49.33,-9.73 49.33,-10.73 50.04,-11.44 J3.10
BOOT0: R2.1 U5.44 | length 47.8
  Top Layer w0.203: U5.44 27.75,4.25 27.83,4.17 v1(27.83,1.5) ; v1(47.3,21.6) 51.3,21.6 51.5,21.8 R2.1
  Bottom Layer w0.203: v1(27.83,1.5) 30.6,4.27 30.6,18.9 33.3,21.6 v1(47.3,21.6)
BOOT1: R3.2 U5.20 | length 29
  Top Layer w0.305: U5.20 26.25,16.749 26.089,16.91 26.089,18.602 32.401,24.913 47.137,24.913 48.4,23.65 R3.2
BY: U5.33 U10.7 | length 26.4
  Top Layer w0.305: U10.7 21.075,-6.825 21.7,-6.2 21.7,-2.7 16.9,2.1 16.9,9.1 17.558,9.758 22.742,9.758 U5.33
DAC0_OUT: R26.2 U6.1 | length 41.6
  Top Layer w0.305: U6.1 61.505,-2.905 64.2,-5.6 76.9,-5.6 78.25,-4.25 78.25,-3 79,-2.25 84.75,-2.25 87.5,0.5 87.5,5.25 86.75,6 R26.2
DAC1_OUT: R29.2 U7.1 | length 61
  Top Layer w0.305: U7.1 59.605,7.095 v1(60.8,5.9) ; v1(60.8,28.4) 76.85,28.4 85.85,19.4 R29.2
  Bottom Layer w0.305: v1(60.8,5.9) v1(60.8,28.4)
DAC_CS0: U5.16 U6.4 | length 58.6
  Top Layer w0.203: U6.4 U6.4@57.048,0.953
  Top Layer w0.305: U5.16 28.25,18.715 33,23.465 43.5,23.465 47.765,19.2 v1(57.9,19.2) ; U6.4 v1(59,0.905)
  Bottom Layer w0.305: v1(57.9,19.2) 57.9,14.4 60.1,12.2 60.1,2.005 v1(59,0.905)
DAC_CS1: U5.14 U7.4 | length 44.2
  Top Layer w0.305: U5.14 29.25,18.35 33.4,22.5 43.1,22.5 47.8,17.8 v1(57,17.8) ; U7.4 v1(59,10.905)
  Bottom Layer w0.305: v1(57,17.8) 57,13.9 59,11.9 v1(59,10.905)
DAC_SCLK: U5.15 U6.5 U7.5 | length 53
  Top Layer w0.305: U5.15 28.75,18.532 33.2,22.983 43.3,22.983 47.902,18.38 v1(48.883,18.38) ; v1(47.985,10.905) U7.5 53.845,10.905 54.25,10.5 54.25,1.5 53.655,0.905 U6.5
  Bottom Layer w0.305: v1(47.985,10.905) 48.883,11.802 48.883,18.327 48.935,18.38 v1(48.883,18.38)
DAC_SPI: U5.17 U6.6 U7.6 | length 61.6
  Top Layer w0.305: U5.17 27.763,15.263 27.763,18.91 32.8,23.948 43.7,23.948 47.847,19.8 v1(50.1,19.8) ; v1(47.985,9.635) U7.6 53.365,9.635 53.624,9.376 53.624,2.624 53.25,2.25 50.55,2.25 50.1,1.8 50.1,0.1 50.565,-0.365 U6.6
  Bottom Layer w0.305: v1(47.985,9.635) 49.035,9.635 50.1,10.7 v1(50.1,19.8)
display1: J4.8 U5.25 | length 15.2
  Top Layer w0.305: J4.8 8.77,11 12.953,11 15.703,13.75 U5.25
display2: J4.9 U5.26 | length 18.5
  Top Layer w0.305: J4.9 7.51,9.8 12.435,9.8 15.885,13.25 U5.26
display3: J4.10 U5.27 | length 15.8
  Top Layer w0.305: J4.10 11.808,8.49 16.074,12.757 21.648,12.757 21.655,12.75 U5.27
display4: J4.11 U5.28 | length 19.2
  Top Layer w0.305: J4.11 7.45,7.2 11.2,7.2 16.274,12.274 21.448,12.274 21.472,12.25 U5.28
display5: J4.12 U5.29 | length 16.4
  Top Layer w0.305: J4.12 10.683,5.95 16.524,11.792 21.248,11.792 21.29,11.75 U5.29
FAN: U5.32 U10.4 U10.5 U10.6 | length 30.1
  Top Layer w0.305: U10.5 17.465,-9.365 16.2,-8.1 16.2,9.1 17.35,10.25 U5.32
  Top Layer w0.457: U10.4 U10.5 U10.6
GND: C1.2 C2.1 C3.2 C4.2 C5.2 C6.2 C7.2 C8.2 C9.2 C10.2 C11.2 C12.2 C13.2 C14.2 C15.2 C16.2 C17.2 C18.2 C19.2 C20.2 C21.2 C23.2 C25.2 C27.1 C28.2 C29.1 CE1.2 CE2.2 CE3.1 CE4.1 D5.A J1.2 J2.1 J3.1 J4.2 J5.5 J5.6 J6.4 J8.1 J9.2 J10.5 Q2.2 R4.2 R16.2 U1.2 U2.1 U3.2 U4.1 U5.8 U5.23 U5.35 U5.47 U6.2 U6.7 U7.2 U7.7 U10.8 X1.2 X1.4 | length 2.9
  Top Layer w0.305: X1.2 40.8,8.95 C12.2
  other v1: 51,-24.25 19.75,-3.75 47.75,-0.5 37.75,1 66.75,4.25 62.4,5.9 43.25,7.5 87,8.25 59,8.365 25.5,9.5 28.75,9.5 66.25,10.25 25.5,12.5 28.75,12.5 37.25,14 66.25,14.5 91.25,15.25 23,22.25 25.25,25
key_in1: J3.2 U5.41 | length 55.5
  Top Layer w0.305: U5.41 26.25,-6.25 29.3,-9.3 46.17,-9.3 47.4,-10.53 47.4,-13.7 47.9,-14.2 59.74,-14.2 J3.2
key_in2: J3.4 U5.42 | length 51.9
  Top Layer w0.305: U5.42 26.75,-6.067 29.482,-8.8 46.353,-8.8 47.883,-10.33 47.883,-13.283 48.317,-13.717 57.683,-13.717 J3.4
key_in3: J3.3 U5.10 | length 44.4
  Top Layer w0.203: U5.10 32.35,12.75 32.585,12.985 v1(32.615,12.985)
  Bottom Layer w0.203: v1(32.615,12.985) 32.615,1.885 37.2,-2.7 47.6,-2.7 50.8,-5.9 56.96,-5.9 J3.3
key_out1: J3.6 U5.43 | length 48.2
  Top Layer w0.305: U5.43 27.25,-5.885 29.665,-8.3 46.535,-8.3 48.365,-10.13 48.365,-12.865 48.735,-13.235 55.625,-13.235 J3.6
key_out2: J3.5 U5.4 | length 39.6
  Top Layer w0.305: U5.4 33.35,9.75 35.5,7.6 v1(35.5,-2.2)
  Bottom Layer w0.305: v1(35.5,-2.2) 36.8,-3.5 47.3,-3.5 50.5,-6.7 55.22,-6.7 J3.5
key_out3: J3.8 U5.45 | length 44.3
  Top Layer w0.305: U5.45 28.25,4.45 28.267,4.433 28.267,2.95 28.411,2.807 28.411,-6.363 29.83,-7.783 46.7,-7.783 48.848,-9.93 48.848,-12.348 49.252,-12.752 53.568,-12.752 J3.8
key_out4: J3.7 U5.3 | length 37.7
  Top Layer w0.305: U5.3 33.15,9.25 34.5,7.9 v1(34.5,-3.2)
  Bottom Layer w0.305: v1(34.5,-3.2) 35.3,-4 46.7,-4 50.1,-7.4 53.38,-7.4 J3.7
MVCC: D5.K J8.2 R15.2 R21.2 | length 63.7
  Top Layer w0.305: v1(66.5,17.25) 67.25,17.25 68,18 R21.2 ; v1(69.712,-16.788) 70.423,-17.5 72.6,-17.5 79.5,-24.4 79.5,-26.25 84.25,-31 D5.K
  Bottom Layer w0.305: v1(66.5,17.25) 69.396,14.354 69.396,-15.37 69.712,-15.686 v1(69.712,-16.788)
N12V0: C29.2 CE4.2 U2.3 U8.11 | length 60.6
  Top Layer w0.457: U8.11 v1(82.5,10) C29.2
  Bottom Layer w0.457: U2.3 60.5,-22 CE4.2 78,-20.5 84.885,-13.615 84.885,7.615 v1(82.5,10)
NetC14_1: C14.1 C15.1 C17.1 L2.1 U6.3 | length 9.9
  Top Layer w0.457: U6.3 59.365,-0.365 60,-1 60.65,-1 ; C14.1 60.65,-1 ; L2.1 C17.1 C15.1 60.65,-1
NetC18_1: C18.1 C19.1 C21.1 L3.1 U7.3 | length 9.9
  Top Layer w0.457: U7.3 59.365,9.635 60,9 60.65,9 ; C18.1 60.65,9 ; L3.1 C21.1 C19.1 60.65,9
NetC22_2: C22.2 R4.1 R5.1 R8.1 U8.5 | length 10
  Top Layer w0.305: C22.2 R4.1 R5.1 R8.1 72.5,8 73.23,8.73 U8.5
NetC30_2: C30.2 R21.1 R22.2 U8.2 | length 12.5
  Top Layer w0.305: R21.1 72.75,18 73,17.75 73,13.25 73.71,12.54 U8.2
  Top Layer w0.457: R21.1 R22.2 C30.2
NetC31_1: C31.1 D7.K U8.8 | length 20.2
  Top Layer w0.305: D7.K 76.35,-2.25 77.35,-1.25 83.5,-1.25 85,0.25 85,3.05 84.15,3.9 C31.1 84.15,4.1 82.06,6.19 U8.8
NetC31_2: C31.2 R25.1 U8.10 | length 10.6
  Top Layer w0.305: U8.10 83.27,8.73 85,7 85,4.95 85.85,4.1 C31.2 85.85,2.15 85.75,2.05 R25.1@85.75,2
NetC32_1: C32.1 D8.K R28.2 U8.14 | length 26.8
  Top Layer w0.305: R28.2 74.75,26 79.65,21.1 D8.K 81.75,19 83.25,17.5 83.25,15.25 ; U8.14 81.81,13.81 83.25,15.25 ; C32.1 85,12.85 85,14.75 84.5,15.25 83.25,15.25
NetC32_2: C32.2 R27.1 U8.12 | length 23.3
  Top Layer w0.305: R27.1 74.05,24 75,23.05 75,17.25 76,16.25 77.5,16.25 78.25,15.5 78.25,12 78.98,11.27 U8.12 83.42,11.27 C32.2
NetD6_A: D6.A R24.2 | length 7.7
  Top Layer w0.305: D6.A 83,-8 83.85,-7.15 R24.2
NetD7_A: D7.A D8.A Q1.1 R24.1 | length 38.4
  Top Layer w0.305: Q1.1 78.95,-9.45 78,-8.5 78,-5.95 79.65,-4.3 D7.A R24.1
  Top Layer w0.457: D8.A 76.35,18.7 76.621,18.429 76.921,18.429 78.85,16.5 v1(81.5,16.5)
  Bottom Layer w0.457: v1(81.25,-4) 81.5,-3.75 v1(81.5,16.5)
NetJ5_3: J5.3 R2.2 | length 8.5
  Top Layer w0.305: J5.3 53.5,29.77 53.5,27.2 51.848,25.548 51.698,25.548 R2.2
NetJ5_4: J5.4 R3.1 | length 8.5
  Top Layer w0.305: R3.1 48.4,25.35 48.152,25.598 46.5,27.25 46.5,29.77 J5.4
NetJ9_1: J9.1 R15.1 R19.2 | length 55.4
  Top Layer w0.305: v1(66.5,12) R19.2 ; R15.1 68,-30.5 68.5,-30.5 74.25,-24.75 74.25,-19.832 73.042,-18.625 69.875,-18.625 68.381,-17.131 68.381,-16.799 v1(68.37,-16.788)
  Bottom Layer w0.305: v1(66.5,12) 67.6,12 68.512,11.088 68.512,6.196 68.5,6.184 68.5,-15.4 68.37,-15.53 v1(68.37,-16.788)
NetJ10_2: J10.2 U10.14 | length 12.5
  Top Layer w0.457: J10.2 7.75,-6 10.5,-8.75 10.5,-10.6 11.805,-11.905 U10.14
NetJ10_3: J10.3 U10.15 | length 11.9
  Top Layer w0.457: J10.3 7.6,-8.5 8.8,-9.7 8.8,-11.3 10.675,-13.175 U10.15
NetJ10_7: J10.7 U10.16 | length 10.7
  Top Layer w0.457: J10.7 7.5,-18.5 11.555,-14.445 U10.16
NetJ11_1: J11.1 U10.11 U10.12 U10.13 | length 53.6
  Top Layer w0.457: v1(11.8,-9.365) U10.12 ; U10.13 U10.12 ; U10.11 U10.12
  Bottom Layer w0.457: J11.1 11.25,29.35 2.5,20.6 2.5,2.6 10.1,-5 10.1,-7.665 v1(11.8,-9.365)
NetQ1_3: Q1.3 R23.1 | length 7.2
  Top Layer w0.305: Q1.3 78,-15.121 78.279,-15.4 79.9,-15.4 81.1,-14.2 81.1,-12.95 81.9,-12.15 R23.1
NetQ2_1: Q2.1 R28.1 | length 12.8
  Top Layer w0.305: Q2.1 59.75,26.025 66.975,26.025 ; 64.65,26 R28.1
NetR10_1: R10.1 R13.2 U8.6 | length 12.2
  Top Layer w0.203: R13.2 71.85,0.1 73,1.25 73,7 73.46,7.46 U8.6
  Top Layer w0.305: R10.1 R13.2
NetR11_2: R11.2 R12.1 | length 4
  Top Layer w0.457: R12.1 R11.2
NetR12_2: R12.2 R14.1 | length 2.3
  Top Layer w0.457: R14.1 R12.2
NetR16_1: R16.1 R17.1 R19.1 U8.3 | length 8
  Top Layer w0.305: R17.1 R16.1 R19.1 72.75,12 73.48,11.27 U8.3
NetR26_1: R26.1 U8.9 | length 4.3
  Top Layer w0.305: U8.9 82.69,7.46 83.852,6.298 83.952,6.298 84.15,6.1 R26.1
NetR29_1: R29.1 U8.13 | length 4.3
  Top Layer w0.305: U8.13 82.79,12.54 84.15,13.9 R29.1
NetU10_10: U10.10 X2.2 | length 120.2
  Top Layer w0.457: v1@11.8,-6.85 11.825,-6.825 U10.10
  Bottom Layer w0.457: v1(11.8,-6.825) 11.8,-5.5 3.135,3.165 3.135,19.835 15.2,31.9 15.2,34.8 16.565,36.165 74.085,36.165 X2.2
NRST: R1.2 U5.7 | length 4.4
  Top Layer w0.305: U5.7 33.75,11.25 34.15,11.65 R1.2
OCP: Q2.3 U5.18 | length 42.6
  Top Layer w0.305: U5.18 27.25,17.529 27.28,17.56 27.28,19.11 32.6,24.43 43.9,24.43 45.83,22.5 48.7,22.5 50.7,24.5 56.1,24.5 56.65,25.05 Q2.3
OSCIN: C12.1 U5.6 X1.3 | length 11.5
  Top Layer w0.305: U5.6 34.132,10.75 35.882,9 C12.1 39.2,8.95 X1.3
OSCOUT: C11.1 U5.5 X1.1 | length 18.3
  Top Layer w0.305: U5.5 33.65,10.25 37,6.9 37,2.7 37.5,2.2 40.85,2.2 ; X1.1 40.85,3.85 40.85,2.2 ; C11.1 40.85,2.2
P3V3: C6.1 C9.1 C10.1 C13.1 C16.1 C20.1 C23.1 J2.4 J4.1 J4.7 J5.1 J5.2 J6.1 L1.2 L2.2 L3.2 R1.1 R5.2 R6.2 R17.2 R18.2 R30.2 U4.2 U4.4 U5.24 U5.36 U5.48 U6.8 U7.8 X2.1 | length 398.2
  Top Layer w0.305: R30.2 R30.2@11.425,1.625 ; v1@14.72,1.625 v1(14.745,1.6) ; C9.1 19.85,7.45 20.65,8.25 U5.36 ; U5.24 C23.1 ; U5.48 29.75,5.5 30,5.25 C10.1 ; R6.2 40.85,13.1 40,13.95 40,18.05 40.85,18.9 R18.2
  Top Layer w0.457: J4.7 6.17,11 6.14,11.03 4.488,11.03 4.22,11.298 ; R30.2 6.65,1.65 4.22,4.08 ; R30.2@11.425,1.625 v1@14.72,1.625 ; v1(19.6,1.6) 19.6,3.2 19.85,3.45 C9.1 ; C23.1 23.1,19.15 19.5,22.75 J6.1 ; C13.1@29.1,26.75 C13.1@29.175,26.825 ; C13.1 J2.4 26,32 20.69,26.69 J6.1 ; C10.1 31.45,4.35 32.2,3.6 32.2,-4.5 33.3,-5.6 U4.4 ; L1.2 35.85,18.9 35,18.05 35,13.95 35.85,13.1 R1.1 35.85,11.15 v1(36,11) ; R6.2 40.85,12.9 44.75,9 v1(44.75,7.5) 44.75,-0.25 43,-2 U4.4 ; U4.2 43,-13 42.1,-13.9 C6.1 42.1,-16.7 41.2,-17.6 38.7,-17.6 37.35,-16.25 24.55,-16.25 20.9,-19.9 8.8,-19.9 7.8,-20.9 3.3,-20.9 2.1,-19.7 2.1,1.96 4.22,4.08 ; C16.1 U6.8 ; C20.1@49.35,7 49.35,-3.1 46.85,-5.6 U4.4 ; C20.1 U7.8 ; L2.2@62.35,3.9 L2.2 62.35,4.1 v1(64.25,6) 64.25,12 62.35,13.9 L3.2 ; v1(64.2,16.3) 64.338,16.162 67.563,16.162 67.701,16.3 69.85,16.3 R17.2 ; v1(67.217,6) 67.25,6 R5.2 ; 4.22,4.08 4.22,11.298 ; 4.22,11.298 4.22,18.22 4.65,18.65 J4.1 6.2,20.5 12.39,26.69 J6.1
  Bottom Layer w0.457: v1(14.745,1.6) v1(19.6,1.6) ; J2.4@29.25,31.85 J2.4 29.25,33.95 29.7,34.4 43.7,34.4 48.64,29.46 J5.2 ; v1(36,11) 41.25,11 v1(44.75,7.5) 44.75,16.25 48.73,20.23 J5.2 ; v1(64.25,6) 64.25,8.75 ; v1(67.217,6) 67.217,6.006 67.5,6.289 67.5,8.982 67.232,9.25 64.75,9.25 64.25,8.75 ; X2.1@87.05,30.25 83.3,26.5 64.2,26.5 ; J5.2 J5.1 63.14,29.46 64.2,28.4 64.2,26.5 ; 64.2,26.5 v1(64.2,16.3) 64.25,16.25 64.25,8.75
P5V0: C4.1 C5.1 U3.3 U4.3 | length 75.9
  Top Layer w0.457: U4.3 45.3,-13.3 45.6,-13.6 C5.1 66.2,-15 67.7,-13.5 68.6,-13.5 69.9,-12.2 73.8,-12.2 74.6,-13 80.1,-13 80.65,-12.45 80.65,-10.95 81.3,-10.3 83.95,-10.3 87.25,-7 87.25,-1.75 88.75,-0.25 88.75,10.75 89.65,11.65 C4.1 92.4,11.65 93.672,12.922 95.12,12.922 U3.3
P12V0: C27.2 CE2.1 D6.K J10.4 J11.2 R23.2 U1.3 U8.4 U10.9 | length 267.3
  Top Layer w0.457: J10.4 3.4,-11 2.9,-10.5 2.9,-5.2 3.4,-4.7 9.9,-4.7 10.755,-5.555 U10.9 ; v3(71.2,-13.2) 72.848,-13.2 75.748,-16.1 82,-16.1 ; v1(71.2,-7.05) 73.45,-7.05 74.4,-8 D6.K ; C27.2 v1(73.675,10) U8.4 ; R23.2 82,-16.1 ; U1.3 93.04,-5 CE2.1 89,-12.5 85.4,-16.1 82,-16.1
  Bottom Layer w0.457: J10.4 3,-11 1.865,-9.865 1.865,20.965 8.75,27.85 J11.2 8.75,35.05 10.5,36.8 91,36.8 91.8,36 91.8,27.6 97.3,22.1 97.3,-0.74 U1.3 ; v3@71.171,-13 71.2,-12.971 v1(71.2,-7.05) 73.675,-4.575 v1(73.675,10)
REL1: U5.38 U10.3 | length 23.1
  Top Layer w0.305: U10.3 22.495,-11.905 24.75,-9.65 U5.38
REL2: U5.40 U10.1 | length 26.1
  Top Layer w0.305: U10.1 22.655,-14.445 25.75,-11.35 U5.40
REL3: U5.39 U10.2 | length 24.8
  Top Layer w0.305: U10.2 22.825,-13.175 25.25,-10.75 U5.39
RXD: J2.2 U5.31 | length 32.3
  Top Layer w0.203: v1(20.85,10.83) 20.93,10.83 21.011,10.75 U5.31
  Bottom Layer w0.203: v1(20.85,10.83) 23.85,10.83 23.93,10.75 26.85,10.75 28.221,12.121 28.221,14.604 28.943,15.327 28.943,24.004 34.25,29.311 J2.2
SD2: J4.6 U5.22 | length 18.8
  Top Layer w0.203: J4.6 10.17,15 20.4,15 v1(21.1,15.7) ; v1(24.987,16.497) 25.003,16.497 25.25,16.25 U5.22
  Bottom Layer w0.203: v1(21.1,15.7) 21.9,15.7 22.697,16.497 v1(24.987,16.497)
SHCP2: J4.4 U5.21 | length 19.4
  Top Layer w0.203: J4.4 20.51,16.11 v1(21.1,16.7) ; v1(25.5,17.3) 25.5,16.626 25.75,16.376 U5.21
  Bottom Layer w0.203: v1(21.1,16.7) 21.7,17.3 v1(25.5,17.3)
STCP2: J4.3 U5.19 | length 23.8
  Top Layer w0.203: J4.3 7.39,17.3 14.11,17.3 14.51,17.7 v1(21.1,17.7) ; v1(26.7,17.8) 26.7,15.3 U5.19
  Bottom Layer w0.203: v1(21.1,17.7) 21.229,17.829 26.671,17.829 v1(26.7,17.8)
SWDCLK: J6.3 U5.37 | length 47.6
  Top Layer w0.203: v1(24.17,5.15) 24.227,5.207 24.227,5.427 24.25,5.45 U5.37
  Bottom Layer w0.203: J6.3 24.93,31.77 28.181,28.519 28.181,15.681 26,13.5 19.339,13.5 18.9,13.061 18.9,10.281 19.381,9.8 23.9,9.8 24.17,9.53 v1(24.17,5.15)
SWDIO: J6.2 U5.34 | length 39.8
  Top Layer w0.305: v1(18.5,8.8) 18.95,9.25 U5.34
  Bottom Layer w0.203: v1(18.5,8.8) 18.5,13.2 19.2,13.9 25.861,13.9 27.8,15.839 27.8,27.3 25.87,29.23 J6.2
TEMP_MONITOR: J10.1 R30.1 U5.13 | length 39.3
  Top Layer w0.203: R30.1@11.4,0 v1(14.7,0) ; U5.13 29.75,16.72 v1(29.83,16.8)
  Top Layer w0.457: J10.1 7.9,-3.5 R30.1@11.4,0
  Bottom Layer w0.203: v1(14.7,0) 20.7,0 29.83,9.13 v1(29.83,16.8)
TXD: J2.3 U5.30 | length 33.6
  Top Layer w0.203: v1(19.429,11.1) 19.48,11.1 19.74,11.36 21.069,11.36 21.179,11.25 U5.30
  Bottom Layer w0.203: v1(19.429,11.1) 19.429,11.129 19.7,11.4 26.8,11.4 27.84,12.44 27.84,14.762 28.562,15.484 28.562,24.162 31.75,27.35 J2.3
VDDA: C7.1 C8.1 L1.1 U5.9 | length 9.2
  Top Layer w0.305: U5.9 32.75,12.25 33.313,12.813 33.313,14.813 33.5,15 C8.1 C7.1 L1.1
VMEAS: J7.2 R14.2 | length 6.6
  Top Layer w0.457: R14.2 44,-31.899 44.567,-32.467 44.567,-32.517 J7.2@45.05,-33
VMEAS_LV: C24.1 R7.2 R10.2 R11.1 | length 42.8
  Top Layer w0.305: R11.1 48.1,-22.85 49.4,-21.55 49.4,-19.3 v1(50.8,-17.9) ; v1(67,-3.25) 68.25,-2 R10.2
  Top Layer w0.457: R7.2 C24.1 R11.1
  Bottom Layer w0.305: v1(50.8,-17.9) 53.1,-15.6 65.6,-15.6 67,-14.2 v1(67,-3.25)
VoltageControl: J10.6 Q1.2 | length 78.1
  Top Layer w0.305: v1(65,-11.7) 68.626,-11.7 70.126,-10.2 76.4,-10.2 77.05,-10.85 Q1.2
  Bottom Layer w0.305: J10.6 5.15,-16 7.25,-18.1 21.7,-18.1 24.8,-15 46.1,-15 47,-14.1 63.6,-14.1 65,-12.7 v1(65,-11.7)
VREF: C24.2 J7.1 R7.1 R8.2 | length 68.4
  Top Layer w0.305: C24.2 C24.2@48.025,-26.875 ; v1(66.5,8) R8.2
  Top Layer w0.457: R7.1 C24.2 48,-31.95 J7.1@46.95,-33
  Bottom Layer w0.305: J7.1 47.25,-32.85 49.4,-30.7 49.4,-17.6 52.183,-14.817 64.483,-14.817 65.75,-13.55 65.75,7.25 v1(66.5,8)
pads on no net: J4.5 U5.1
copper on no net:
  other v1: 59,-1.635

## Polygon pours and split planes (outlines as drawn)
GND on Top Layer "Top Layer-No Net" (solid, remove dead copper, pour order 4): 0,-37.65 100,-37.65 100,37.65 0,37.65
MVCC on Top Layer "MVCC_L01_P001" (solid, pour order 1): 85.25,-35.75 92.75,-35.75 94,-34.5 94,-27.5 98.5,-23 98.5,-19 85.5,-19 85.25,-19.25
NetJ9_1 on Top Layer "NETJ9_1_L01_P000" (solid, pour order 0): 56,-36.25 70,-36.25 71.25,-35 71.25,-26.25 70,-25 56,-25
GND on Bottom Layer "Top Layer-No Net1" (solid, remove dead copper, pour order 5): 0,-37.65 100,-37.65 100,37.65 0,37.65
MVCC on Bottom Layer "MVCC_L04_P003" (solid, pour order 3): 85.25,-35.75 92.75,-35.75 94,-34.5 94,-27.5 98.5,-23 98.5,-19 85.5,-19 85.25,-19.25
NetJ9_1 on Bottom Layer "NETJ9_1_L04_P002" (solid, pour order 2): 56,-36.25 70,-36.25 71.25,-35 71.25,-26.25 70,-25 56,-25
no net on Int1 (GND) (split plane): 99.49,-37.14 0.51,-37.14 0.51,37.14 99.49,37.14
no net on Int2 (GND) (split plane): 99.49,-37.14 0.51,-37.14 0.51,37.14 99.49,37.14

## Silkscreen, mask and mechanical layers (free items; w line width, h text height)
Top Overlay:
  text "._ProjectName" at 55.75,31.296 h3.81
  text "Rev ._Revision" at 42.474,28.25 h2.54 r90
Board:
  the board outline again, w0.254

## Text inside footprints (layer, text, board x,y; h text height)
LG1: Top Overlay "E" at 23.424,-11.82 h10.16